# Altium PCB BCM_ECU_revA_V2.PcbDoc (part 1 of 4)
Units mm, origin at the board's own origin, x right, y up, seen from the top; angles counter-clockwise.
Board outline 170 x 110 mm, 4 copper layers (TOP SIG, GND, PWR, BOT SIG), stack 0.603 mm thick; 422 components, 413 nets, 1412 pads, 185 vias.
Unrouted connection lines stored in the file: 642.
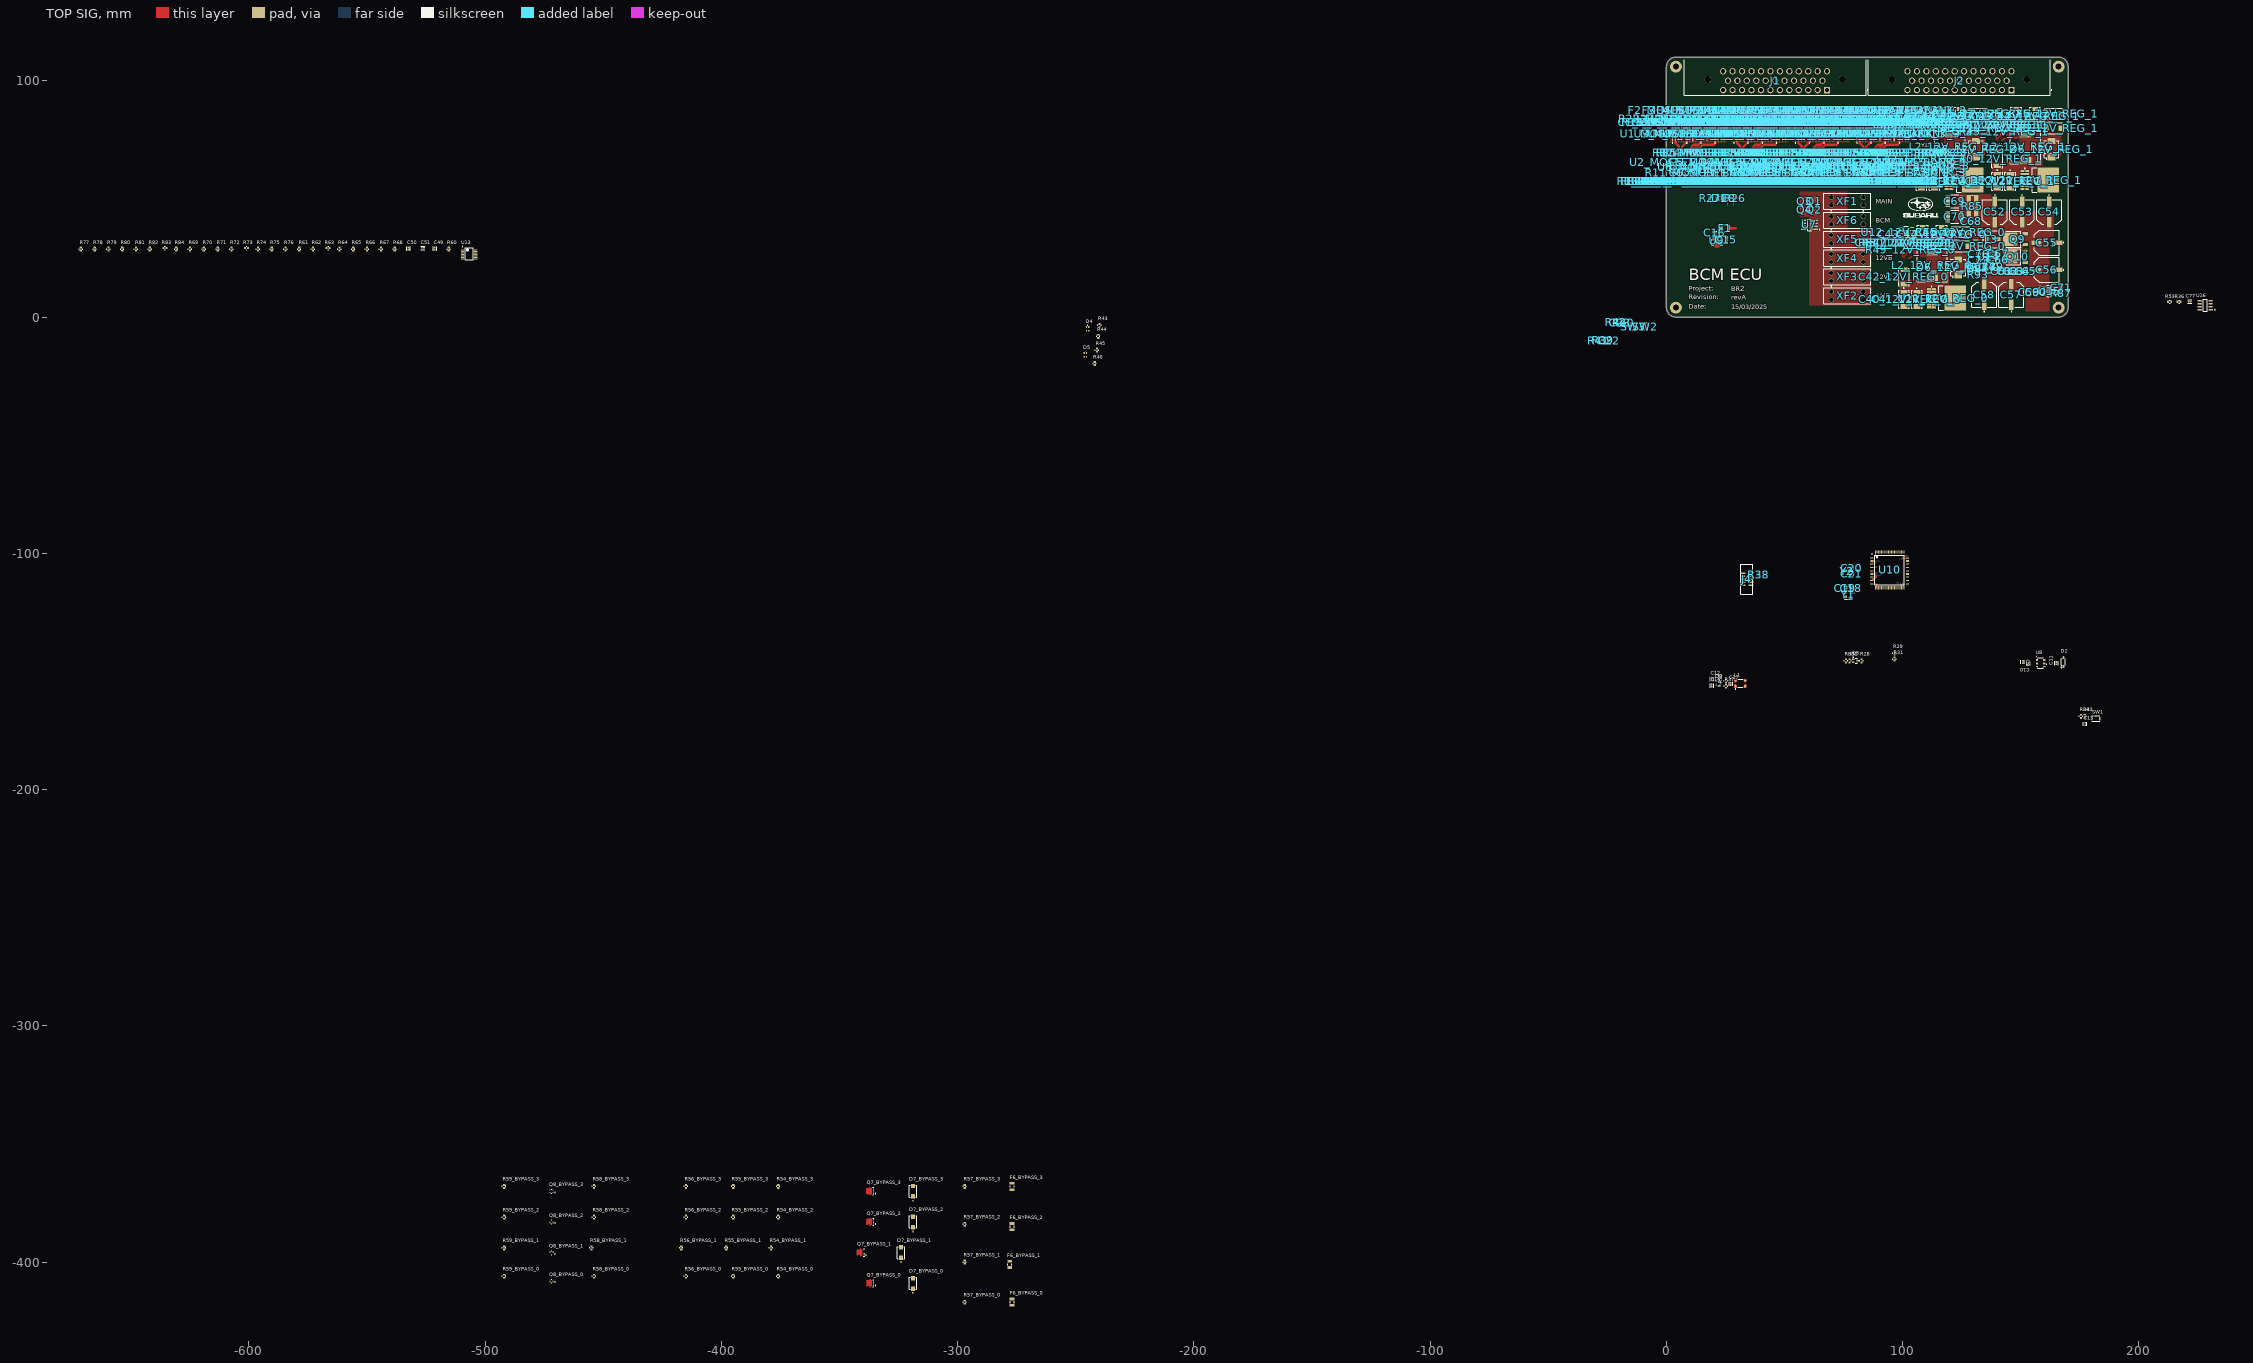
[diagram p0: TOP SIG view]
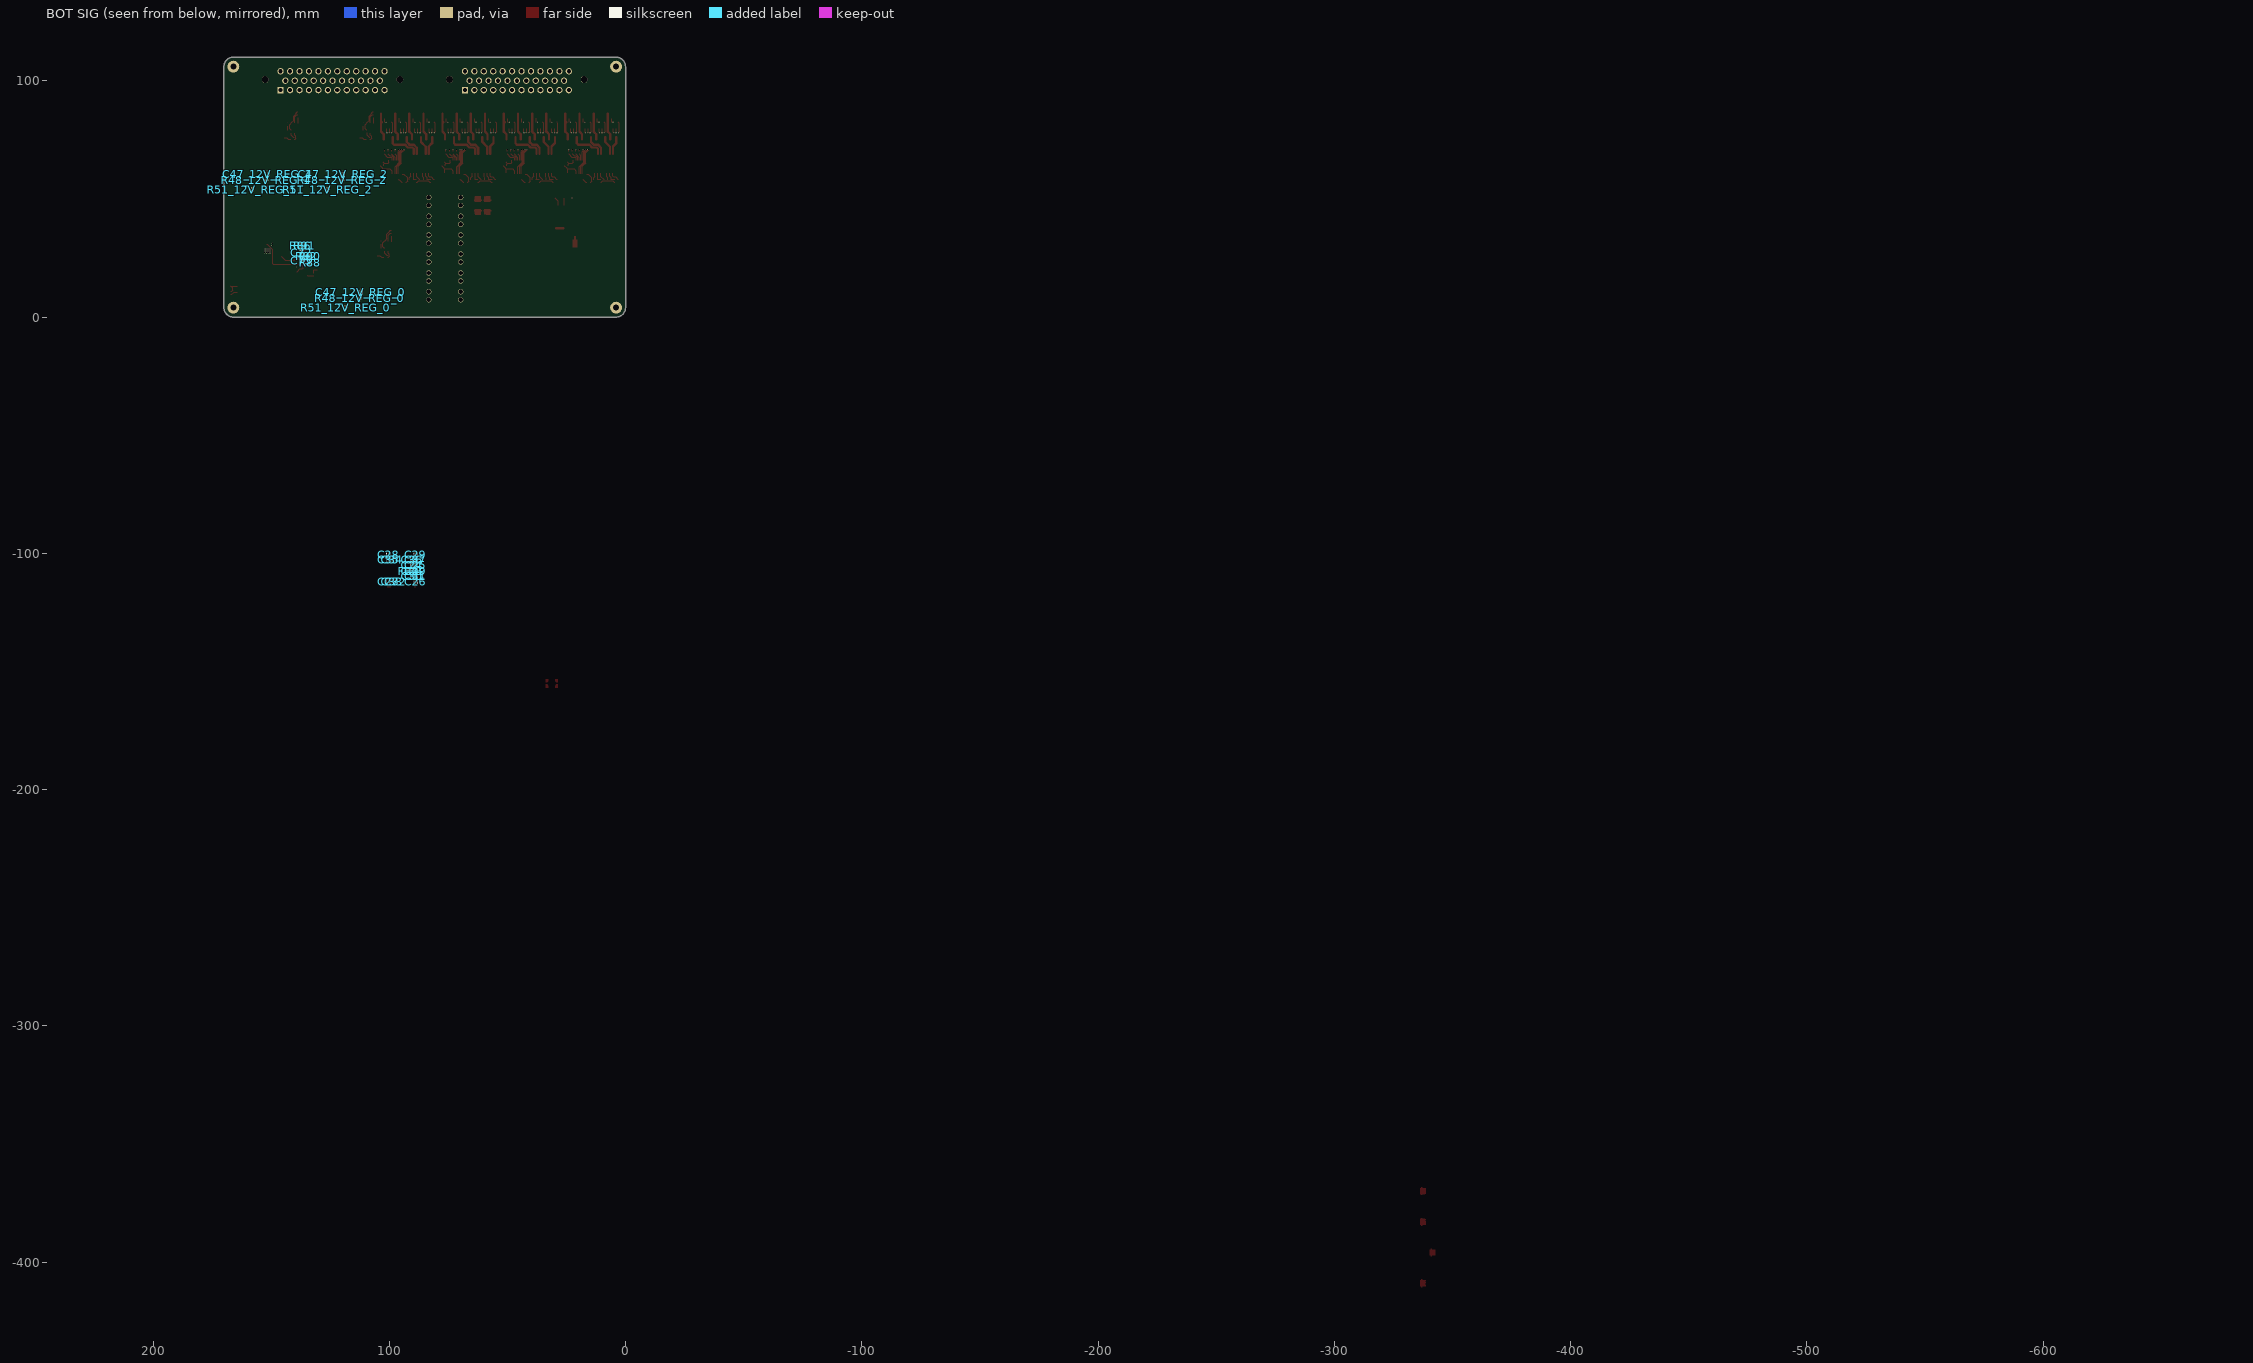
[diagram p1: BOT SIG view, seen from below]
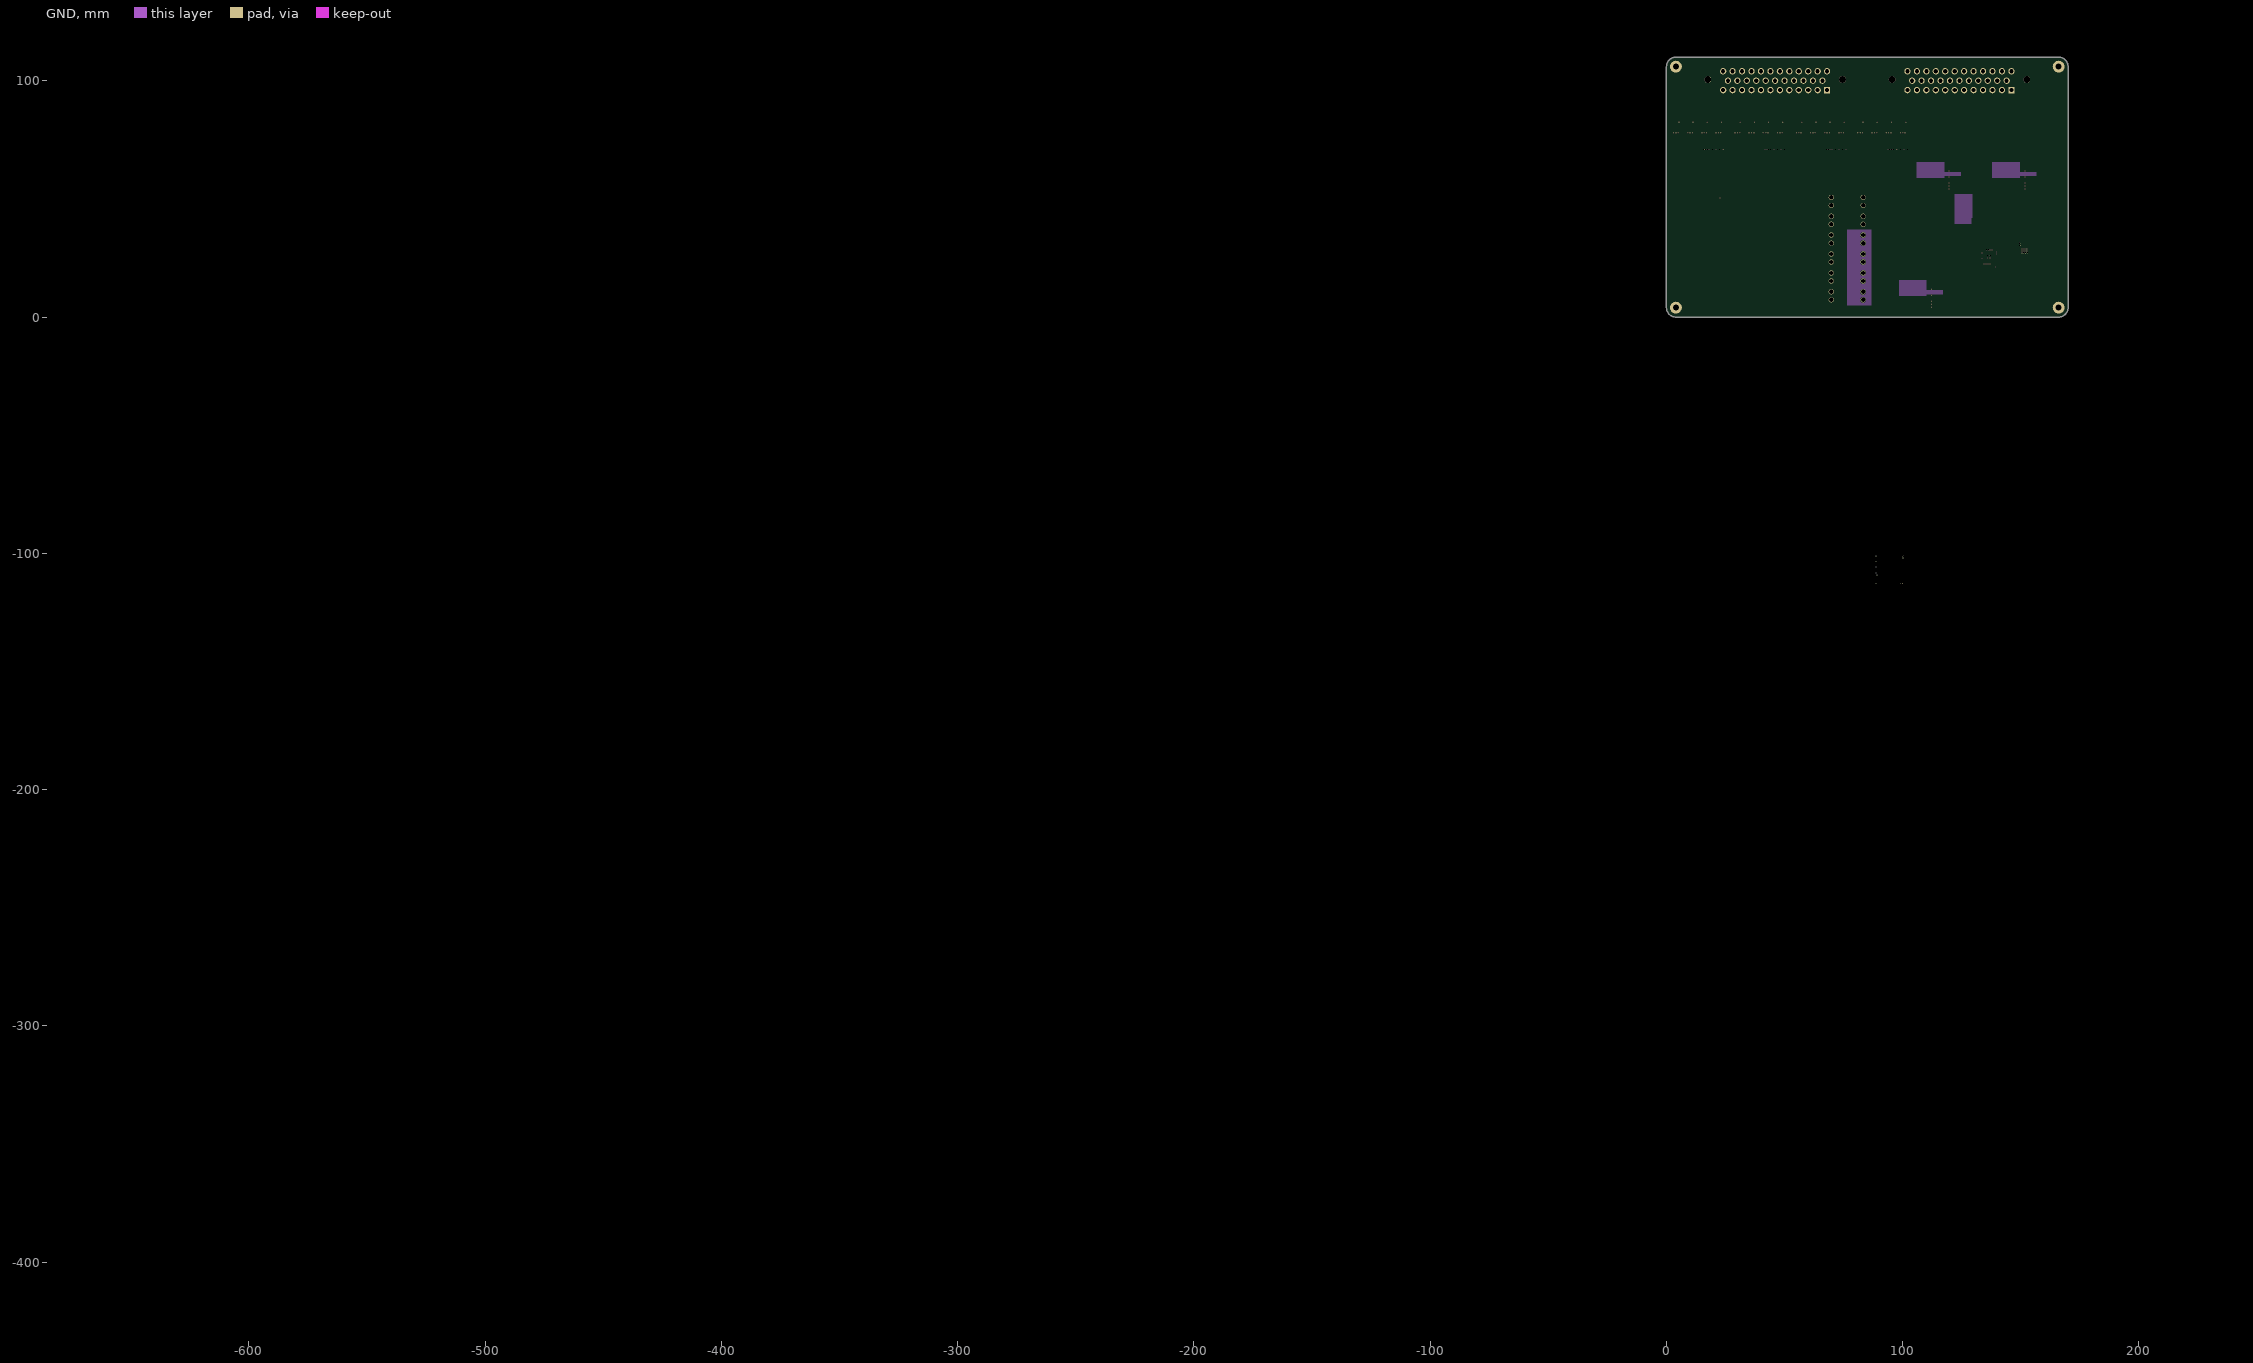
[diagram p2: GND]

## Layer stack, top to bottom
Top Solder: solder mask 0.0102, Solder Resist, Dk 3.5
TOP SIG: signal copper 0.0356
Dielectric 2: prepreg 0.0711, PP-006, Dk 4.1
GND: signal copper 0.035
Dielectric 1: dielectric 0.32, FR-4, Dk 4.8
PWR: signal copper 0.035
Dielectric 3: prepreg 0.0711, PP-006, Dk 4.1
BOT SIG: signal copper 0.0356
Bottom Solder: solder mask 0.0102, Solder Resist, Dk 3.5

## Board outline
0,4 ccw(c4,4) 4,0 166,0 ccw(c166,4) 170,4 170,106 ccw(c166,106) 166,110 4,110 ccw(c4,106) 0,106

## Design rules (kind name [scope] priority, off if disabled: settings)
BoardOutlineClearance [All] p1: gap=0.2 ignorepadtopadclearanceinfootprint=FALSE
Clearance [All] p1: gap=0.102 ignorepadtopadclearanceinfootprint=FALSE except(0.127: Arc-Via Track-Via SMDPad-Via THPad-Via Via-Via Via-Fill Via-Poly Via-Region Via-Text; 0.25: Arc-Hole Track-Hole SMDPad-Hole THPad-Hole Via-Hole Fill-Hole Poly-Hole Region-Hole Text-Hole)
ComponentClearance [All] p1: gap=0.102 collisioncheckmode=3 verticalgap=0.102 showdistances=TRUE
DiffPairsRouting [All] p1: maxlimit=0.102 minlimit=0.102 mostfreqgap=0.102 toplayer_minwidth=0.102 toplayer_maxwidth=1816.048 toplayer_prefwidth=0.102 midlayer1_minwidth=0.102 midlayer1_maxwidth=1816.048 midlayer1_prefwidth=0.102 midlayer2_minwidth=0.102 midlayer2_maxwidth=1816.048 midlayer2_prefwidth=0.102 bottomlayer_minwidth=0.102 bottomlayer_maxwidth=1816.048 bottomlayer_prefwidth=0.102 maxuncoupledlength=12.7
Height [All] p1: minheight=0 maxheight=1816.048 prefheight=12.7
HoleSize [All] p1: absolutevalues=TRUE maxlimit=6.3 minlimit=0.2 maxpercent=80.000 minpercent=20.000
HoleToHoleClearance [All] p1: gap=0.25 allowstackedmicrovias=FALSE
MinimumAnnularRing [All] p1: minimumring=0.076
MinimumSolderMaskSliver [All] p1: minsoldermaskwidth=0
PlaneClearance [All] p1: clearance=0.102
PlaneConnect PlaneConnectPowerPads [InPadClass('PowerPads')] p1: planeconnectstyle=Direct reliefexpansion=0.508 reliefentries=4 reliefconductorwidth=0.254 reliefairgap=0.254
PlaneConnect [All] p2: pad.planeconnectstyle=Relief pad.reliefexpansion=0.3 pad.reliefentries=4 pad.reliefconductorwidth=0.102 pad.reliefairgap=0.102 via.planeconnectstyle=Direct via.reliefexpansion=0.3 via.reliefentries=4 via.reliefconductorwidth=0.127 via.reliefairgap=0.127
PolygonConnect PolygonConnectPowerPads [All vs (InPadClass('PowerPads'))] p1: connectstyle=Direct reliefconductorwidth=0.254 reliefentries=4 polygonreliefangle="90 Angle" airgapwidth=0.254
PolygonConnect [All] p2: thpad.connectstyle=Relief thpad.reliefconductorwidth=0.102 thpad.reliefentries=4 thpad.polygonreliefangle="90 Angle" thpad.airgapwidth=0.102 smdpad.connectstyle=Relief smdpad.reliefconductorwidth=0.102 smdpad.reliefentries=4 smdpad.polygonreliefangle="90 Angle" smdpad.airgapwidth=0.102 via.connectstyle=Direct via.reliefconductorwidth=0.127 via.reliefentries=4 via.polygonreliefangle="90 Angle" via.airgapwidth=0.127
RoomDefinition 12V_REG_0 [InComponentClass('12V_REG_0')] p1: confinementstyle=ConfineIn formatcopy=TRUE lockcomponents=FALSE outline 129.5,40 97.5,40 97.5,2 129.5,2
RoomDefinition AMP_REG_0 [InComponentClass('AMP_REG_0')] p2: confinementstyle=ConfineIn formatcopy=TRUE lockcomponents=FALSE outline 117,2 169,2 169,52.5 117,52.5
RoomDefinition 12V_REG_1 [InComponentClass('12V_REG_1')] p3: confinementstyle=ConfineIn formatcopy=TRUE lockcomponents=FALSE outline 169,90 137,90 137,52 169,52
RoomDefinition 12V_REG_2 [InComponentClass('12V_REG_2')] p4: confinementstyle=ConfineIn formatcopy=TRUE lockcomponents=FALSE outline 137,90 105,90 105,52 137,52
RoomDefinition MOSFET_BANK_3 [InComponentClass('MOSFET_BANK_3')] p5: confinementstyle=ConfineIn formatcopy=TRUE lockcomponents=FALSE outline 79,56 105,56 105,90 79,90
RoomDefinition MOSFET_BANK_2 [InComponentClass('MOSFET_BANK_2')] p6: confinementstyle=ConfineIn formatcopy=TRUE lockcomponents=FALSE outline 53,56 79,56 79,90 53,90
RoomDefinition MOSFET_BANK_1 [InComponentClass('MOSFET_BANK_1')] p7: confinementstyle=ConfineIn formatcopy=TRUE lockcomponents=FALSE outline 27,56 53,56 53,90 27,90
RoomDefinition MOSFET_BANK_0 [InComponentClass('MOSFET_BANK_0')] p8: confinementstyle=ConfineIn formatcopy=TRUE lockcomponents=FALSE outline 1,56 27,56 27,90 1,90
RoomDefinition BYPASS_3 [InComponentClass('BYPASS_3')] p9: confinementstyle=ConfineIn formatcopy=TRUE lockcomponents=FALSE outline -585,-417 -557,-417 -557,-402 -585,-402
RoomDefinition BYPASS_2 [InComponentClass('BYPASS_2')] p10: confinementstyle=ConfineIn formatcopy=TRUE lockcomponents=FALSE outline -672,-394 -652,-394 -652,-374 -672,-374
RoomDefinition BYPASS_1 [InComponentClass('BYPASS_1')] p11: confinementstyle=ConfineIn formatcopy=TRUE lockcomponents=FALSE outline -660,-411 -627,-411 -627,-400 -660,-400
RoomDefinition BYPASS_0 [InComponentClass('BYPASS_0')] p12: confinementstyle=ConfineIn formatcopy=TRUE lockcomponents=FALSE outline -609,-426 -595,-426 -595,-417 -609,-417
RoutingVias [All] p1: holewidth=0.2 width=0.45 viastyle="Through Hole" minholewidth=0.2 minwidth=0.45 maxholewidth=6.3 maxwidth=6.55
SilkToSilkClearance [All] p1: silktosilkclearance=0
SilkToSolderMaskClearance [IsPad] p1: minsilkscreentomaskgap=0.102 clearancetoexposedcopper=TRUE
SolderMaskExpansion [All] p1: expansion=0.075 istentingtop=FALSE
Width [All] p1: maxlimit=1816.048 minlimit=0.102 preferedwidth=0.102
20 further rules are at their usual default settings.

## Classes and differential pairs
component class MEM_0: C77 R36 R53 U16
component class AMP_REG_0: C52 C53 C54 C55 C56 C57 C58 C59 C60 C61 C62 C63 C64 C65 C66 C67 C68 C69 C70 C71 C72 C73 C74 C75 C76 D8 L3 Q9 Q10 R85 R86 R87 R88 R89 R90 R91 R92 R93 R94 U14 U15
component class 12V_REG_2: C40_12V_REG_2 C41_12V_REG_2 C42_12V_REG_2 C43_12V_REG_2 C44_12V_REG_2 C45_12V_REG_2 C46_12V_REG_2 C47_12V_REG_2 C48_12V_REG_2 D6_12V_REG_2 L2_12V_REG_2 R47_12V_REG_2 R48_12V_REG_2 R49_12V_REG_2 R50_12V_REG_2 R51_12V_REG_2 R52_12V_REG_2 U11_12V_REG_2 U12_12V_REG_2
channel class MOSFET_BANK: MOSFET_BANK_0 MOSFET_BANK_1 MOSFET_BANK_2 MOSFET_BANK_3
channel class BYPASS_BLOCK: BYPASS_0 BYPASS_1 BYPASS_2 BYPASS_3
channel class 12V_REG: 12V_REG_0 12V_REG_1 12V_REG_2
net class 120DIFF: CAN_N CAN_P PRE_CAN_N PRE_CAN_P TERM_CAP
component class PWR_MGMT: C8 C9 C10 C11 C12 C13 C14 C15 C16 C17 D1 D2 D3 L1 Q1 Q2 Q3 Q4 Q5 Q6 Q7 R26 R27 R28 R29 R30 R31 R32 R33 R34 R35 R37 SW1 U7 U8 U9
component class MOSFET_BANK_3: C1_MOSFET_BANK_3 C2_MOSFET_BANK_3 C3_MOSFET_BANK_3 C4_MOSFET_BANK_3 C5_MOSFET_BANK_3 C6_MOSFET_BANK_3 C7_MOSFET_BANK_3 F2_MOSFET_BANK_3 F3_MOSFET_BANK_3 F4_MOSFET_BANK_3 F5_MOSFET_BANK_3 R1_MOSFET_BANK_3 R2_MOSFET_BANK_3 R3_MOSFET_BANK_3 R4_MOSFET_BANK_3 R5_MOSFET_BANK_3 R6_MOSFET_BANK_3 R7_MOSFET_BANK_3 R8_MOSFET_BANK_3 R9_MOSFET_BANK_3 R10_MOSFET_BANK_3 R11_MOSFET_BANK_3 R12_MOSFET_BANK_3 R13_MOSFET_BANK_3 R14_MOSFET_BANK_3 R15_MOSFET_BANK_3 R16_MOSFET_BANK_3 R17_MOSFET_BANK_3 R18_MOSFET_BANK_3 R19_MOSFET_BANK_3 R20_MOSFET_BANK_3 R21_MOSFET_BANK_3 R22_MOSFET_BANK_3 R23_MOSFET_BANK_3 R24_MOSFET_BANK_3 R25_MOSFET_BANK_3 U1_MOSFET_BANK_3 U2_MOSFET_BANK_3 U3_MOSFET_BANK_3 U4_MOSFET_BANK_3 U5_MOSFET_BANK_3 U6_MOSFET_BANK_3
component class MOSFET_BANK_2: C1_MOSFET_BANK_2 C2_MOSFET_BANK_2 C3_MOSFET_BANK_2 C4_MOSFET_BANK_2 C5_MOSFET_BANK_2 C6_MOSFET_BANK_2 C7_MOSFET_BANK_2 F2_MOSFET_BANK_2 F3_MOSFET_BANK_2 F4_MOSFET_BANK_2 F5_MOSFET_BANK_2 R1_MOSFET_BANK_2 R2_MOSFET_BANK_2 R3_MOSFET_BANK_2 R4_MOSFET_BANK_2 R5_MOSFET_BANK_2 R6_MOSFET_BANK_2 R7_MOSFET_BANK_2 R8_MOSFET_BANK_2 R9_MOSFET_BANK_2 R10_MOSFET_BANK_2 R11_MOSFET_BANK_2 R12_MOSFET_BANK_2 R13_MOSFET_BANK_2 R14_MOSFET_BANK_2 R15_MOSFET_BANK_2 R16_MOSFET_BANK_2 R17_MOSFET_BANK_2 R18_MOSFET_BANK_2 R19_MOSFET_BANK_2 R20_MOSFET_BANK_2 R21_MOSFET_BANK_2 R22_MOSFET_BANK_2 R23_MOSFET_BANK_2 R24_MOSFET_BANK_2 R25_MOSFET_BANK_2 U1_MOSFET_BANK_2 U2_MOSFET_BANK_2 U3_MOSFET_BANK_2 U4_MOSFET_BANK_2 U5_MOSFET_BANK_2 U6_MOSFET_BANK_2
component class MOSFET_BANK_1: C1_MOSFET_BANK_1 C2_MOSFET_BANK_1 C3_MOSFET_BANK_1 C4_MOSFET_BANK_1 C5_MOSFET_BANK_1 C6_MOSFET_BANK_1 C7_MOSFET_BANK_1 F2_MOSFET_BANK_1 F3_MOSFET_BANK_1 F4_MOSFET_BANK_1 F5_MOSFET_BANK_1 R1_MOSFET_BANK_1 R2_MOSFET_BANK_1 R3_MOSFET_BANK_1 R4_MOSFET_BANK_1 R5_MOSFET_BANK_1 R6_MOSFET_BANK_1 R7_MOSFET_BANK_1 R8_MOSFET_BANK_1 R9_MOSFET_BANK_1 R10_MOSFET_BANK_1 R11_MOSFET_BANK_1 R12_MOSFET_BANK_1 R13_MOSFET_BANK_1 R14_MOSFET_BANK_1 R15_MOSFET_BANK_1 R16_MOSFET_BANK_1 R17_MOSFET_BANK_1 R18_MOSFET_BANK_1 R19_MOSFET_BANK_1 R20_MOSFET_BANK_1 R21_MOSFET_BANK_1 R22_MOSFET_BANK_1 R23_MOSFET_BANK_1 R24_MOSFET_BANK_1 R25_MOSFET_BANK_1 U1_MOSFET_BANK_1 U2_MOSFET_BANK_1 U3_MOSFET_BANK_1 U4_MOSFET_BANK_1 U5_MOSFET_BANK_1 U6_MOSFET_BANK_1
component class MOSFET_BANK_0: C1_MOSFET_BANK_0 C2_MOSFET_BANK_0 C3_MOSFET_BANK_0 C4_MOSFET_BANK_0 C5_MOSFET_BANK_0 C6_MOSFET_BANK_0 C7_MOSFET_BANK_0 F2_MOSFET_BANK_0 F3_MOSFET_BANK_0 F4_MOSFET_BANK_0 F5_MOSFET_BANK_0 R1_MOSFET_BANK_0 R2_MOSFET_BANK_0 R3_MOSFET_BANK_0 R4_MOSFET_BANK_0 R5_MOSFET_BANK_0 R6_MOSFET_BANK_0 R7_MOSFET_BANK_0 R8_MOSFET_BANK_0 R9_MOSFET_BANK_0 R10_MOSFET_BANK_0 R11_MOSFET_BANK_0 R12_MOSFET_BANK_0 R13_MOSFET_BANK_0 R14_MOSFET_BANK_0 R15_MOSFET_BANK_0 R16_MOSFET_BANK_0 R17_MOSFET_BANK_0 R18_MOSFET_BANK_0 R19_MOSFET_BANK_0 R20_MOSFET_BANK_0 R21_MOSFET_BANK_0 R22_MOSFET_BANK_0 R23_MOSFET_BANK_0 R24_MOSFET_BANK_0 R25_MOSFET_BANK_0 U1_MOSFET_BANK_0 U2_MOSFET_BANK_0 U3_MOSFET_BANK_0 U4_MOSFET_BANK_0 U5_MOSFET_BANK_0 U6_MOSFET_BANK_0
component class MCU_0: C18 C19 C20 C21 C22 C23 C24 C25 C26 C27 C28 C29 C30 C31 C32 C33 C34 C35 C36 C37 C38 C39 D4 D5 FB1 J4 R38 R39 R40 R41 R42 R43 R44 R45 R46 SW2 SW3 U10 Y1 Y2
component class BCM_ECU: F1 J1 J2 XF1 XF2 XF3 XF4 XF5 XF6
component class BYPASS_3: D7_BYPASS_3 F6_BYPASS_3 Q7_BYPASS_3 Q8_BYPASS_3 R54_BYPASS_3 R55_BYPASS_3 R56_BYPASS_3 R57_BYPASS_3 R58_BYPASS_3 R59_BYPASS_3
component class BYPASS_2: D7_BYPASS_2 F6_BYPASS_2 Q7_BYPASS_2 Q8_BYPASS_2 R54_BYPASS_2 R55_BYPASS_2 R56_BYPASS_2 R57_BYPASS_2 R58_BYPASS_2 R59_BYPASS_2
component class BYPASS_1: D7_BYPASS_1 F6_BYPASS_1 Q7_BYPASS_1 Q8_BYPASS_1 R54_BYPASS_1 R55_BYPASS_1 R56_BYPASS_1 R57_BYPASS_1 R58_BYPASS_1 R59_BYPASS_1
component class BYPASS_0: D7_BYPASS_0 F6_BYPASS_0 Q7_BYPASS_0 Q8_BYPASS_0 R54_BYPASS_0 R55_BYPASS_0 R56_BYPASS_0 R57_BYPASS_0 R58_BYPASS_0 R59_BYPASS_0
component class ADC_0: C49 C50 C51 R60 R61 R62 R63 R64 R65 R66 R67 R68 R69 R70 R71 R72 R73 R74 R75 R76 R77 R78 R79 R80 R81 R82 R83 R84 U13
component class 12V_REG_1: C40_12V_REG_1 C41_12V_REG_1 C42_12V_REG_1 C43_12V_REG_1 C44_12V_REG_1 C45_12V_REG_1 C46_12V_REG_1 C47_12V_REG_1 C48_12V_REG_1 D6_12V_REG_1 G L2_12V_REG_1 R47_12V_REG_1 R48_12V_REG_1 R49_12V_REG_1 R50_12V_REG_1 R51_12V_REG_1 R52_12V_REG_1 U11_12V_REG_1 U12_12V_REG_1
component class 12V_REG_0: C40_12V_REG_0 C41_12V_REG_0 C42_12V_REG_0 C43_12V_REG_0 C44_12V_REG_0 C45_12V_REG_0 C46_12V_REG_0 C47_12V_REG_0 C48_12V_REG_0 D6_12V_REG_0 L2_12V_REG_0 R47_12V_REG_0 R48_12V_REG_0 R49_12V_REG_0 R50_12V_REG_0 R51_12V_REG_0 R52_12V_REG_0 U11_12V_REG_0 U12_12V_REG_0
differential pair X: +X_P -X_N
differential pair X32: +X32_P -X32_N
differential pair PRE_CAN: +PRE_CAN_P -PRE_CAN_N

## Components (designator, comment, footprint, x,y, rotation, side; value= is the part's Value field where it differs from the comment)
C1_MOSFET_BANK_0 "100n" FP-0402-L_1_0_0_05-W_0_5-IPC_A 3.5,82.5 r0 top (schematic designator C1)
C1_MOSFET_BANK_1 "100n" FP-0402-L_1_0_0_05-W_0_5-IPC_A 29.5,82.5 r0 top (schematic designator C1)
C1_MOSFET_BANK_2 "100n" FP-0402-L_1_0_0_05-W_0_5-IPC_A 55.5,82.5 r0 top (schematic designator C1)
C1_MOSFET_BANK_3 "100n" FP-0402-L_1_0_0_05-W_0_5-IPC_A 81.5,82.5 r0 top (schematic designator C1)
C2_MOSFET_BANK_0 "100n" FP-0402-L_1_0_0_05-W_0_5-IPC_A 9.5,82.5 r0 top (schematic designator C2)
C2_MOSFET_BANK_1 "100n" FP-0402-L_1_0_0_05-W_0_5-IPC_A 35.5,82.5 r0 top (schematic designator C2)
C2_MOSFET_BANK_2 "100n" FP-0402-L_1_0_0_05-W_0_5-IPC_A 61.5,82.5 r0 top (schematic designator C2)
C2_MOSFET_BANK_3 "100n" FP-0402-L_1_0_0_05-W_0_5-IPC_A 87.5,82.5 r0 top (schematic designator C2)
C3_MOSFET_BANK_0 "100n" FP-0402-L_1_0_0_05-W_0_5-IPC_A 15.5,82.5 r0 top (schematic designator C3)
C3_MOSFET_BANK_1 "100n" FP-0402-L_1_0_0_05-W_0_5-IPC_A 41.5,82.5 r0 top (schematic designator C3)
C3_MOSFET_BANK_2 "100n" FP-0402-L_1_0_0_05-W_0_5-IPC_A 67.5,82.5 r0 top (schematic designator C3)
C3_MOSFET_BANK_3 "100n" FP-0402-L_1_0_0_05-W_0_5-IPC_A 93.5,82.5 r0 top (schematic designator C3)
C4_MOSFET_BANK_0 "100n" FP-0402-L_1_0_0_05-W_0_5-IPC_A 21.5,82.5 r0 top (schematic designator C4)
C4_MOSFET_BANK_1 "100n" FP-0402-L_1_0_0_05-W_0_5-IPC_A 47.5,82.5 r0 top (schematic designator C4)
C4_MOSFET_BANK_2 "100n" FP-0402-L_1_0_0_05-W_0_5-IPC_A 73.5,82.5 r0 top (schematic designator C4)
C4_MOSFET_BANK_3 "100n" FP-0402-L_1_0_0_05-W_0_5-IPC_A 99.5,82.5 r0 top (schematic designator C4)
C5_MOSFET_BANK_0 "100n" FP-0402-L_1_0_0_05-W_0_5-IPC_A 25,65.5 r0 top (schematic designator C5)
C5_MOSFET_BANK_1 "100n" FP-0402-L_1_0_0_05-W_0_5-IPC_A 51,65.5 r0 top (schematic designator C5)
C5_MOSFET_BANK_2 "100n" FP-0402-L_1_0_0_05-W_0_5-IPC_A 77,65.5 r0 top (schematic designator C5)
C5_MOSFET_BANK_3 "100n" FP-0402-L_1_0_0_05-W_0_5-IPC_A 103,65.5 r0 top (schematic designator C5)
C6_MOSFET_BANK_0 "100n" FP-0402-L_1_0_0_05-W_0_5-IPC_A 25,61 r0 top (schematic designator C6)
C6_MOSFET_BANK_1 "100n" FP-0402-L_1_0_0_05-W_0_5-IPC_A 51,61 r0 top (schematic designator C6)
C6_MOSFET_BANK_2 "100n" FP-0402-L_1_0_0_05-W_0_5-IPC_A 77,61 r0 top (schematic designator C6)
C6_MOSFET_BANK_3 "100n" FP-0402-L_1_0_0_05-W_0_5-IPC_A 103,61 r0 top (schematic designator C6)
C7_MOSFET_BANK_0 "100n" FP-0402-L_1_0_0_05-W_0_5-IPC_A 25,62.5 r0 top (schematic designator C7)
C7_MOSFET_BANK_1 "100n" FP-0402-L_1_0_0_05-W_0_5-IPC_A 51,62.5 r0 top (schematic designator C7)
C7_MOSFET_BANK_2 "100n" FP-0402-L_1_0_0_05-W_0_5-IPC_A 77,62.5 r0 top (schematic designator C7)
C7_MOSFET_BANK_3 "100n" FP-0402-L_1_0_0_05-W_0_5-IPC_A 103,62.5 r0 top (schematic designator C7)
C8 "100n" FP-0402-L_1_0_0_05-W_0_5-IPC_A 26.37,50.396 r0 top
C9 "100n" FP-0402-L_1_0_0_05-W_0_5-IPC_A 150.75,-146 r270 top
C10 "100n" FP-0402-L_1_0_0_05-W_0_5-IPC_A 153.25,-146.75 r270 top
C11 "100n" FP-0402-L_1_0_0_05-W_0_5-IPC_A 165,-146.479 r90 top
C12 "6.6p" FP-0402-L_1_0_0_05-W_0_5-IPC_A 19.25,-153.229 r90 top
C13 "100n" FP-0402-L_1_0_0_05-W_0_5-IPC_A 177.25,-172.25 r90 top
C14 "6.6p" FP-0402-L_1_0_0_05-W_0_5-IPC_A 19.25,-156 r90 top
C15 "C0805C225K9PACTU" CAPC2013X145X50ML20T25 25.37,32.646 r90 top
C16 "100n" FP-0402-L_1_0_0_05-W_0_5-IPC_A 20.37,35.646 r0 top
C17 "100n" FP-0402-L_1_0_0_05-W_0_5-IPC_A 27.25,-155.229 r90 top
C18 "6.8p" FP-0402-L_1_0_0_05-W_0_5-IPC_A 78.25,-114.75 r0 top
C19 "6.8p" FP-0402-L_1_0_0_05-W_0_5-IPC_A 75.75,-114.75 r180 top
C20 "18p" FP-0402-L_1_0_0_05-W_0_5-IPC_A 78.5,-106.25 r90 top
C21 "18p" FP-0402-L_1_0_0_05-W_0_5-IPC_A 78.5,-108.75 r270 top
C22 "100n" FP-0402-L_1_0_0_05-W_0_5-IPC_A -24.164,-10.021 r90 top
C23 "100n" FP-0402-L_1_0_0_05-W_0_5-IPC_A -19.664,-2.5 r90 top
C24 "100n" FP-0402-L_1_0_0_05-W_0_5-IPC_A 90.25,-105 r90 bottom
C25 "100n" FP-0402-L_1_0_0_05-W_0_5-IPC_A 88.75,-105 r90 bottom
C26 "100n" FP-0402-L_1_0_0_05-W_0_5-IPC_A 88.75,-112 r90 bottom
C27 "100n" FP-0402-L_1_0_0_05-W_0_5-IPC_A 100.25,-112 r90 bottom
C28 "100n" FP-0402-L_1_0_0_05-W_0_5-IPC_A 100.25,-100.5 r90 bottom
C29 "100n" FP-0402-L_1_0_0_05-W_0_5-IPC_A 88.75,-100.5 r90 bottom
C30 "1u" FP-0402-L_1_0_0_05-W_0_5-IPC_A 90.25,-109.75 r270 bottom
C31 "100n" FP-0402-L_1_0_0_05-W_0_5-IPC_A 88.75,-109.75 r270 bottom
C32 "2.2u" FP-0402-L_1_0_0_05-W_0_5-IPC_A 97.25,-112 r90 bottom
C33 "100n" FP-0402-L_1_0_0_05-W_0_5-IPC_A 98.75,-112 r90 bottom
C34 "2.2u" FP-0402-L_1_0_0_05-W_0_5-IPC_A 98.75,-102.75 r270 bottom
C35 "100n" FP-0402-L_1_0_0_05-W_0_5-IPC_A 100.25,-102.75 r270 bottom
C36 "1u" FP-0402-L_1_0_0_05-W_0_5-IPC_A 90.25,-102.75 r90 bottom
C37 "100n" FP-0402-L_1_0_0_05-W_0_5-IPC_A 88.75,-102.75 r90 bottom
C38 "1u" FP-0402-L_1_0_0_05-W_0_5-IPC_A 90.25,-107.5 r90 bottom
C39 "100n" FP-0402-L_1_0_0_05-W_0_5-IPC_A 88.75,-107.5 r90 bottom
C40_12V_REG_0 "TPSE686K025R0125" FP-TPSE-MFG 100.5,7.5 r90 top (schematic designator C40)
C40_12V_REG_1 "TPSE686K025R0125" FP-TPSE-MFG 140,67.01 r270 top (schematic designator C40)
C40_12V_REG_2 "TPSE686K025R0125" FP-TPSE-MFG 113.5,57.5 r90 top (schematic designator C40)
C41_12V_REG_0 "TPSE686K025R0125" FP-TPSE-MFG 106,7.5 r90 top (schematic designator C41)
C41_12V_REG_1 "TPSE686K025R0125" FP-TPSE-MFG 140,57.5 r90 top (schematic designator C41)
C41_12V_REG_2 "TPSE686K025R0125" FP-TPSE-MFG 108,57.5 r90 top (schematic designator C41)
C42_12V_REG_0 "TPSE686K025R0125" FP-TPSE-MFG 100.5,17 r270 top (schematic designator C42)
C42_12V_REG_1 "TPSE686K025R0125" FP-TPSE-MFG 145.5,57.5 r90 top (schematic designator C42)
C42_12V_REG_2 "TPSE686K025R0125" FP-TPSE-MFG 108,67 r270 top (schematic designator C42)
C43_12V_REG_0 "T495D107K016ATE125" FP-T495D107K016ATE125-MFG 108.5,35 r270 top (schematic designator C43)
C43_12V_REG_1 "T495D107K016ATE125" FP-T495D107K016ATE125-MFG 148,85 r270 top (schematic designator C43)
C43_12V_REG_2 "T495D107K016ATE125" FP-T495D107K016ATE125-MFG 116,85 r270 top (schematic designator C43)
C44_12V_REG_0 "T495D107K016ATE125" FP-T495D107K016ATE125-MFG 116.5,35 r270 top (schematic designator C44)
C44_12V_REG_1 "T495D107K016ATE125" FP-T495D107K016ATE125-MFG 156,85 r270 top (schematic designator C44)
C44_12V_REG_2 "T495D107K016ATE125" FP-T495D107K016ATE125-MFG 124,85 r270 top (schematic designator C44)
C45_12V_REG_0 "T495D107K016ATE125" FP-T495D107K016ATE125-MFG 124.5,36 r180 top (schematic designator C45)
C45_12V_REG_1 "T495D107K016ATE125" FP-T495D107K016ATE125-MFG 164,86 r180 top (schematic designator C45)
C45_12V_REG_2 "T495D107K016ATE125" FP-T495D107K016ATE125-MFG 132,86 r180 top (schematic designator C45)
C46_12V_REG_0 "T495D107K016ATE125" FP-T495D107K016ATE125-MFG 124.5,30 r180 top (schematic designator C46)
C46_12V_REG_1 "T495D107K016ATE125" FP-T495D107K016ATE125-MFG 164,80 r180 top (schematic designator C46)
C46_12V_REG_2 "T495D107K016ATE125" FP-T495D107K016ATE125-MFG 132,80 r180 top (schematic designator C46)
C47_12V_REG_0 "100n" FP-0402-L_1_0_0_05-W_0_5-IPC_A 112,10.5 r270 bottom (schematic designator C47)
C47_12V_REG_1 "100n" FP-0402-L_1_0_0_05-W_0_5-IPC_A 151.5,60.5 r270 bottom (schematic designator C47)
C47_12V_REG_2 "100n" FP-0402-L_1_0_0_05-W_0_5-IPC_A 119.5,60.5 r270 bottom (schematic designator C47)
C48_12V_REG_0 "100n" FP-0402-L_1_0_0_05-W_0_5-IPC_A 99,31.5 r270 top (schematic designator C48)
C48_12V_REG_1 "100n" FP-0402-L_1_0_0_05-W_0_5-IPC_A 138.5,81.5 r270 top (schematic designator C48)
C48_12V_REG_2 "100n" FP-0402-L_1_0_0_05-W_0_5-IPC_A 106.5,81.5 r270 top (schematic designator C48)
C49 "100n" FP-0402-L_1_0_0_05-W_0_5-IPC_A -521.304,29.004 r90 top
C50 "100n" FP-0402-L_1_0_0_05-W_0_5-IPC_A -532.48,29.004 r90 top
C51 "100n" FP-0402-L_1_0_0_05-W_0_5-IPC_A -526.384,29.258 r0 top
C52 "50SVPF68M" FP-OS-CON-SMT-F12-MFG 139,44.5 r270 top
C53 "50SVPF68M" FP-OS-CON-SMT-F12-MFG 150.5,44.5 r270 top
C54 "50SVPF68M" FP-OS-CON-SMT-F12-MFG 162,44.5 r270 top
C55 "50SVPF68M" FP-OS-CON-SMT-F12-MFG 161,31.5 r180 top
C56 "50SVPF68M" FP-OS-CON-SMT-F12-MFG 161,20 r180 top
C57 "50SVPF68M" FP-OS-CON-SMT-F12-MFG 146,9.5 r90 top
C58 "50SVPF68M" FP-OS-CON-SMT-F12-MFG 134.5,9.5 r90 top
C59 "GRM31CR61H106KA12L" FP-GRM31-0_2-MFG 153.5,10.5 r270 top value=10uF
C60 "GRM31CR61H106KA12L" FP-GRM31-0_2-MFG 156.5,10.5 r270 top value=10uF
C61 "GRM31CR61H106KA12L" FP-GRM31-0_2-MFG 142,19.5 r90 top value=10uF
C62 "GRM31CR61H106KA12L" FP-GRM31-0_2-MFG 144.5,19.5 r90 top value=10uF
C63 "GRM31CR61H106KA12L" FP-GRM31-0_2-MFG 147,19.5 r90 top value=10uF
C64 "GRM31CR61H106KA12L" FP-GRM31-0_2-MFG 149.5,19.5 r90 top value=10uF
C65 "GRM31CR61H106KA12L" FP-GRM31-0_2-MFG 152,19.5 r90 top value=10uF
C66 "100n" FP-0402-L_1_0_0_05-W_0_5-IPC_A 140.5,24.25 r90 top
C67 "1u" FP-0402-L_1_0_0_05-W_0_5-IPC_A 140.5,26.75 r90 top
C68 "C1206C105K5RACTU" CAPC3216X110X50LL20T25 129,40.5 r180 top
C69 "CKG57NX5R1H226M500JH" FP-CKG57N-MFG 122,49 r180 top
C70 "CKG57NX5R1H226M500JH" FP-CKG57N-MFG 122,42.5 r180 top
C71 "100n" FP-0402-L_1_0_0_05-W_0_5-IPC_A 167,12.5 r270 top
C72 "4.7u" FP-0402-L_1_0_0_05-W_0_5-IPC_A 137,27.25 r180 bottom
C73 "470n" FP-0402-L_1_0_0_05-W_0_5-IPC_A 132.25,24 r270 top
C74 "47p" FP-0402-L_1_0_0_05-W_0_5-IPC_A 135,21.25 r0 top
C75 "6.8n" FP-0402-L_1_0_0_05-W_0_5-IPC_A 137,23.75 r0 bottom
C76 "470p" FP-0402-L_1_0_0_05-W_0_5-IPC_A 132.25,26.5 r270 top
C77 "100n" FP-0402-L_1_0_0_05-W_0_5-IPC_A 221.498,6.499 r180 top
D1 "MMSZ5242BT1G" ONSC-SOD-123-2-425-04_V 22.62,50.396 r180 top
D2 "1N4148W-TP" FP-SOD-123-IPC_A 168,-146 r90 top
D3 "ESDCAN02-2BWY" FP-SOT323-3L-MFG 22,-155 r0 top value=3pF
D4 "150066RG54050" WL-SBCD_0606 -245,-5 r0 top
D5 "150066RG54050" WL-SBCD_0606 -246,-16 r0 top
D6_12V_REG_0 "B540C-13-F" FP-SMC-MFG 123.5,21 r90 top value=300pF (schematic designator D6)
D6_12V_REG_1 "B540C-13-F" FP-SMC-MFG 163,71 r90 top value=300pF (schematic designator D6)
D6_12V_REG_2 "B540C-13-F" FP-SMC-MFG 131,71 r90 top value=300pF (schematic designator D6)
D7_BYPASS_0 "SK34A-LTP" SK34A-LTP-Footprint-1 -319,-409 r90 top (schematic designator D7)
D7_BYPASS_1 "SK34A-LTP" SK34A-LTP-Footprint-1 -324,-396 r90 top (schematic designator D7)
D7_BYPASS_2 "SK34A-LTP" SK34A-LTP-Footprint-1 -319,-383 r90 top (schematic designator D7)
D7_BYPASS_3 "SK34A-LTP" SK34A-LTP-Footprint-1 -319,-370 r90 top (schematic designator D7)
D8 "MM5Z3V3T1G" ONSC-SOD-523-2-502-01_V 130.5,20.5 r90 top
F1 "0ZCH0075AF2E" 0ZCH0075AF2E-Footprint-1 24.87,37.646 r180 top
F2_MOSFET_BANK_0 "0466003.NR" FP-0466-MFG 7.5,87.5 r90 top value=0.019Ω (schematic designator F2)
F2_MOSFET_BANK_1 "0466003.NR" FP-0466-MFG 33.5,87.5 r90 top value=0.019Ω (schematic designator F2)
F2_MOSFET_BANK_2 "0466003.NR" FP-0466-MFG 59.5,87.5 r90 top value=0.019Ω (schematic designator F2)
F2_MOSFET_BANK_3 "0466003.NR" FP-0466-MFG 85.5,87.5 r90 top value=0.019Ω (schematic designator F2)
F3_MOSFET_BANK_0 "0466003.NR" FP-0466-MFG 13.5,87.5 r90 top value=0.019Ω (schematic designator F3)
F3_MOSFET_BANK_1 "0466003.NR" FP-0466-MFG 39.5,87.5 r90 top value=0.019Ω (schematic designator F3)
F3_MOSFET_BANK_2 "0466003.NR" FP-0466-MFG 65.5,87.5 r90 top value=0.019Ω (schematic designator F3)
F3_MOSFET_BANK_3 "0466003.NR" FP-0466-MFG 91.5,87.5 r90 top value=0.019Ω (schematic designator F3)
F4_MOSFET_BANK_0 "0466003.NR" FP-0466-MFG 19.5,87.5 r90 top value=0.019Ω (schematic designator F4)
F4_MOSFET_BANK_1 "0466003.NR" FP-0466-MFG 45.5,87.5 r90 top value=0.019Ω (schematic designator F4)
F4_MOSFET_BANK_2 "0466003.NR" FP-0466-MFG 71.5,87.5 r90 top value=0.019Ω (schematic designator F4)
F4_MOSFET_BANK_3 "0466003.NR" FP-0466-MFG 97.5,87.5 r90 top value=0.019Ω (schematic designator F4)
F5_MOSFET_BANK_0 "0466003.NR" FP-0466-MFG 25.5,87.5 r90 top value=0.019Ω (schematic designator F5)
F5_MOSFET_BANK_1 "0466003.NR" FP-0466-MFG 51.5,87.5 r90 top value=0.019Ω (schematic designator F5)
F5_MOSFET_BANK_2 "0466003.NR" FP-0466-MFG 77.5,87.5 r90 top value=0.019Ω (schematic designator F5)
F5_MOSFET_BANK_3 "0466003.NR" FP-0466-MFG 103.5,87.5 r90 top value=0.019Ω (schematic designator F5)
F6_BYPASS_0 "0466003.NR" FP-0466-MFG -277,-417 r270 top value=0.019Ω (schematic designator F6)
F6_BYPASS_1 "0466003.NR" FP-0466-MFG -278,-401 r270 top value=0.019Ω (schematic designator F6)
F6_BYPASS_2 "0466003.NR" FP-0466-MFG -277,-385 r270 top value=0.019Ω (schematic designator F6)
F6_BYPASS_3 "0466003.NR" FP-0466-MFG -277,-368 r270 top value=0.019Ω (schematic designator F6)
FB1 "BLM15PX601SN1D" FP-BLM15-0_05-IPC_A 91.75,-107.5 r270 bottom
J1 "776163-1" FP-776163-1-MFG 46,113 r180 top
J2 "776163-1" FP-776163-1-MFG 124,113 r180 top
J4 "3220-10-0300-00" 3220-10-0300-00-Footprint-1 34,-111 r0 top
L1 "SRF4532-510Y" FP-SRF4532-MFG 31.25,-155 r0 top
L2_12V_REG_0 "SRP1265A-100M" FP-SRP1265A-100M-MFG 112.5,22 r90 top (schematic designator L2)
L2_12V_REG_1 "SRP1265A-100M" FP-SRP1265A-100M-MFG 152,72 r90 top (schematic designator L2)
L2_12V_REG_2 "SRP1265A-100M" FP-SRP1265A-100M-MFG 120,72 r90 top (schematic designator L2)
L3 "744311100" WE-HCI_7040 137.5,33 r90 top
Q1 "SISH615ADN-T1-GE3" SISH615ADN-T1-GE3-Footprint-1 62.463,49.49 r0 top
Q2 "SISH615ADN-T1-GE3" SISH615ADN-T1-GE3-Footprint-1 62.538,45.01 r180 top
Q3 "SISH615ADN-T1-GE3" SISH615ADN-T1-GE3-Footprint-1 58.462,49.49 r0 top
Q4 "SISH615ADN-T1-GE3" SISH615ADN-T1-GE3-Footprint-1 58.538,45.01 r180 top
Q5 "BSS138W-7-F" DIOD-SOT323-3_V 80,-145.5 r0 top
Q7_BYPASS_0 "SISH615ADN-T1-GE3" SISH615ADN-T1-GE3-Footprint-1 -337,-409 r90 top (schematic designator Q7)
Q7_BYPASS_1 "SISH615ADN-T1-GE3" SISH615ADN-T1-GE3-Footprint-1 -341,-396 r90 top (schematic designator Q7)
Q7_BYPASS_2 "SISH615ADN-T1-GE3" SISH615ADN-T1-GE3-Footprint-1 -337,-383 r90 top (schematic designator Q7)
Q7_BYPASS_3 "SISH615ADN-T1-GE3" SISH615ADN-T1-GE3-Footprint-1 -337,-370 r90 top (schematic designator Q7)
Q8_BYPASS_0 "SSM6L56FE,LM" FP-SON6-P-0_50-MFG -472,-408 r90 top (schematic designator Q8)
Q8_BYPASS_1 "SSM6L56FE,LM" FP-SON6-P-0_50-MFG -472,-396 r90 top (schematic designator Q8)
Q8_BYPASS_2 "SSM6L56FE,LM" FP-SON6-P-0_50-MFG -472,-383 r90 top (schematic designator Q8)
Q8_BYPASS_3 "SSM6L56FE,LM" FP-SON6-P-0_50-MFG -472,-370 r90 top (schematic designator Q8)
Q9 "SUD80460E-GE3" FP-T16-0236-MFG 147.744,33 r90 top
Q10 "SUD80460E-GE3" FP-T16-0236-MFG 147.744,25.5 r90 top
R1_MOSFET_BANK_0 "1k" R0603B 3,57.5 r90 top (schematic designator R1)
R1_MOSFET_BANK_1 "1k" R0603B 29,57.5 r90 top (schematic designator R1)
R1_MOSFET_BANK_2 "1k" R0603B 55,57.5 r90 top (schematic designator R1)
R1_MOSFET_BANK_3 "1k" R0603B 81,57.5 r90 top (schematic designator R1)
R2_MOSFET_BANK_0 "1k" R0603B 7.5,57.5 r90 top (schematic designator R2)
R2_MOSFET_BANK_1 "1k" R0603B 33.5,57.5 r90 top (schematic designator R2)
R2_MOSFET_BANK_2 "1k" R0603B 59.5,57.5 r90 top (schematic designator R2)
R2_MOSFET_BANK_3 "1k" R0603B 85.5,57.5 r90 top (schematic designator R2)
R3_MOSFET_BANK_0 "1k" R0603B 9,57.5 r90 top (schematic designator R3)
R3_MOSFET_BANK_1 "1k" R0603B 35,57.5 r90 top (schematic designator R3)
R3_MOSFET_BANK_2 "1k" R0603B 61,57.5 r90 top (schematic designator R3)
R3_MOSFET_BANK_3 "1k" R0603B 87,57.5 r90 top (schematic designator R3)
R4_MOSFET_BANK_0 "1k" R0603B 13.5,57.5 r90 top (schematic designator R4)
R4_MOSFET_BANK_1 "1k" R0603B 39.5,57.5 r90 top (schematic designator R4)
R4_MOSFET_BANK_2 "1k" R0603B 65.5,57.5 r90 top (schematic designator R4)
R4_MOSFET_BANK_3 "1k" R0603B 91.5,57.5 r90 top (schematic designator R4)
R5_MOSFET_BANK_0 "1k" R0603B 12,57.5 r90 top (schematic designator R5)
R5_MOSFET_BANK_1 "1k" R0603B 38,57.5 r90 top (schematic designator R5)
R5_MOSFET_BANK_2 "1k" R0603B 64,57.5 r90 top (schematic designator R5)
R5_MOSFET_BANK_3 "1k" R0603B 90,57.5 r90 top (schematic designator R5)
R6_MOSFET_BANK_0 "1k" R0603B 6,57.5 r90 top (schematic designator R6)
R6_MOSFET_BANK_1 "1k" R0603B 32,57.5 r90 top (schematic designator R6)
R6_MOSFET_BANK_2 "1k" R0603B 58,57.5 r90 top (schematic designator R6)
R6_MOSFET_BANK_3 "1k" R0603B 84,57.5 r90 top (schematic designator R6)
R7_MOSFET_BANK_0 "100k" R0603B 10.5,57.5 r270 top (schematic designator R7)
R7_MOSFET_BANK_1 "100k" R0603B 36.5,57.5 r270 top (schematic designator R7)
R7_MOSFET_BANK_2 "100k" R0603B 62.5,57.5 r270 top (schematic designator R7)
R7_MOSFET_BANK_3 "100k" R0603B 88.5,57.5 r270 top (schematic designator R7)
R8_MOSFET_BANK_0 "100k" R0603B 4.5,57.5 r270 top (schematic designator R8)
R8_MOSFET_BANK_1 "100k" R0603B 30.5,57.5 r270 top (schematic designator R8)
R8_MOSFET_BANK_2 "100k" R0603B 56.5,57.5 r270 top (schematic designator R8)
R8_MOSFET_BANK_3 "100k" R0603B 82.5,57.5 r270 top (schematic designator R8)
R9_MOSFET_BANK_0 "100k" R0603B 18,57.5 r270 top (schematic designator R9)
R9_MOSFET_BANK_1 "100k" R0603B 44,57.5 r270 top (schematic designator R9)
R9_MOSFET_BANK_2 "100k" R0603B 70,57.5 r270 top (schematic designator R9)
R9_MOSFET_BANK_3 "100k" R0603B 96,57.5 r270 top (schematic designator R9)
R10_MOSFET_BANK_0 "1k" R0603B 16.5,57.5 r90 top (schematic designator R10)
R10_MOSFET_BANK_1 "1k" R0603B 42.5,57.5 r90 top (schematic designator R10)
R10_MOSFET_BANK_2 "1k" R0603B 68.5,57.5 r90 top (schematic designator R10)
R10_MOSFET_BANK_3 "1k" R0603B 94.5,57.5 r90 top (schematic designator R10)
R11_MOSFET_BANK_0 "ERT-J1VR103J" RESC1608X90X30ML15T20 16.5,61 r90 top (schematic designator R11)
R11_MOSFET_BANK_1 "ERT-J1VR103J" RESC1608X90X30ML15T20 42.5,61 r90 top (schematic designator R11)
R11_MOSFET_BANK_2 "ERT-J1VR103J" RESC1608X90X30ML15T20 68.5,61 r90 top (schematic designator R11)
R11_MOSFET_BANK_3 "ERT-J1VR103J" RESC1608X90X30ML15T20 94.5,61 r90 top (schematic designator R11)
R12_MOSFET_BANK_0 "1k" R0603B 15,57.5 r90 top (schematic designator R12)
R12_MOSFET_BANK_1 "1k" R0603B 41,57.5 r90 top (schematic designator R12)
R12_MOSFET_BANK_2 "1k" R0603B 67,57.5 r90 top (schematic designator R12)
R12_MOSFET_BANK_3 "1k" R0603B 93,57.5 r90 top (schematic designator R12)
R13_MOSFET_BANK_0 "1k" R0603B 24,69.5 r90 top (schematic designator R13)
R13_MOSFET_BANK_1 "1k" R0603B 50,69.5 r90 top (schematic designator R13)
R13_MOSFET_BANK_2 "1k" R0603B 76,69.5 r90 top (schematic designator R13)
R13_MOSFET_BANK_3 "1k" R0603B 102,69.5 r90 top (schematic designator R13)
R14_MOSFET_BANK_0 "1k" R0603B 22.5,69.5 r90 top (schematic designator R14)
R14_MOSFET_BANK_1 "1k" R0603B 48.5,69.5 r90 top (schematic designator R14)
R14_MOSFET_BANK_2 "1k" R0603B 74.5,69.5 r90 top (schematic designator R14)
R14_MOSFET_BANK_3 "1k" R0603B 100.5,69.5 r90 top (schematic designator R14)
R15_MOSFET_BANK_0 "1k" R0603B 21,69.5 r90 top (schematic designator R15)
R15_MOSFET_BANK_1 "1k" R0603B 47,69.5 r90 top (schematic designator R15)
R15_MOSFET_BANK_2 "1k" R0603B 73,69.5 r90 top (schematic designator R15)
R15_MOSFET_BANK_3 "1k" R0603B 99,69.5 r90 top (schematic designator R15)
R16_MOSFET_BANK_0 "56" R0603B 25,64 r0 top (schematic designator R16)
R16_MOSFET_BANK_1 "56" R0603B 51,64 r0 top (schematic designator R16)
R16_MOSFET_BANK_2 "56" R0603B 77,64 r0 top (schematic designator R16)
R16_MOSFET_BANK_3 "56" R0603B 103,64 r0 top (schematic designator R16)
R17_MOSFET_BANK_0 "1k" R0603B 19.5,69.5 r90 top (schematic designator R17)
R17_MOSFET_BANK_1 "1k" R0603B 45.5,69.5 r90 top (schematic designator R17)
R17_MOSFET_BANK_2 "1k" R0603B 71.5,69.5 r90 top (schematic designator R17)
R17_MOSFET_BANK_3 "1k" R0603B 97.5,69.5 r90 top (schematic designator R17)
R18_MOSFET_BANK_0 "100k" R0603B 6.5,82.5 r0 top value=10k (schematic designator R18)
R18_MOSFET_BANK_1 "100k" R0603B 32.5,82.5 r0 top value=10k (schematic designator R18)
R18_MOSFET_BANK_2 "100k" R0603B 58.5,82.5 r0 top value=10k (schematic designator R18)
R18_MOSFET_BANK_3 "100k" R0603B 84.5,82.5 r0 top value=10k (schematic designator R18)
R19_MOSFET_BANK_0 "100k" R0603B 12.5,82.5 r0 top value=10k (schematic designator R19)
R19_MOSFET_BANK_1 "100k" R0603B 38.5,82.5 r0 top value=10k (schematic designator R19)
R19_MOSFET_BANK_2 "100k" R0603B 64.5,82.5 r0 top value=10k (schematic designator R19)
R19_MOSFET_BANK_3 "100k" R0603B 90.5,82.5 r0 top value=10k (schematic designator R19)
R20_MOSFET_BANK_0 "100k" R0603B 18.5,82.5 r0 top value=10k (schematic designator R20)
R20_MOSFET_BANK_1 "100k" R0603B 44.5,82.5 r0 top value=10k (schematic designator R20)
R20_MOSFET_BANK_2 "100k" R0603B 70.5,82.5 r0 top value=10k (schematic designator R20)
R20_MOSFET_BANK_3 "100k" R0603B 96.5,82.5 r0 top value=10k (schematic designator R20)
R21_MOSFET_BANK_0 "100k" R0603B 24.5,82.5 r0 top value=10k (schematic designator R21)
R21_MOSFET_BANK_1 "100k" R0603B 50.5,82.5 r0 top value=10k (schematic designator R21)
R21_MOSFET_BANK_2 "100k" R0603B 76.5,82.5 r0 top value=10k (schematic designator R21)
R21_MOSFET_BANK_3 "100k" R0603B 102.5,82.5 r0 top value=10k (schematic designator R21)
R22_MOSFET_BANK_0 "24k" R0603B 5.25,84 r180 top value=2.7k (schematic designator R22)
R22_MOSFET_BANK_1 "24k" R0603B 31.25,84 r180 top value=2.7k (schematic designator R22)
R22_MOSFET_BANK_2 "24k" R0603B 57.25,84 r180 top value=2.7k (schematic designator R22)
R22_MOSFET_BANK_3 "24k" R0603B 83.25,84 r180 top value=2.7k (schematic designator R22)
R23_MOSFET_BANK_0 "24k" R0603B 11.25,84 r180 top value=2.7k (schematic designator R23)
R23_MOSFET_BANK_1 "24k" R0603B 37.25,84 r180 top value=2.7k (schematic designator R23)
R23_MOSFET_BANK_2 "24k" R0603B 63.25,84 r180 top value=2.7k (schematic designator R23)
R23_MOSFET_BANK_3 "24k" R0603B 89.25,84 r180 top value=2.7k (schematic designator R23)
R24_MOSFET_BANK_0 "24k" R0603B 17.25,84 r180 top value=2.7k (schematic designator R24)
R24_MOSFET_BANK_1 "24k" R0603B 43.25,84 r180 top value=2.7k (schematic designator R24)
R24_MOSFET_BANK_2 "24k" R0603B 69.25,84 r180 top value=2.7k (schematic designator R24)
R24_MOSFET_BANK_3 "24k" R0603B 95.25,84 r180 top value=2.7k (schematic designator R24)
R25_MOSFET_BANK_0 "24k" R0603B 23.25,84 r180 top value=2.7k (schematic designator R25)
R25_MOSFET_BANK_1 "24k" R0603B 49.25,84 r180 top value=2.7k (schematic designator R25)
R25_MOSFET_BANK_2 "24k" R0603B 75.25,84 r180 top value=2.7k (schematic designator R25)
R25_MOSFET_BANK_3 "24k" R0603B 101.25,84 r180 top value=2.7k (schematic designator R25)
R26 "100k" R0603B 29.12,50.396 r180 top
R27 "100k" R0603B 18.62,50.396 r0 top
R28 "100k" R0603B 82.5,-145.5 r90 top
R29 "100k" R0603B 96.5,-142.25 r90 top
R30 "1k" R0603B 76,-145.5 r90 top
R31 "24k" R0603B 96.5,-144.75 r90 top
R32 "100k" R0603B 77.5,-145.5 r90 top
R33 "100k" R0603B 177,-169 r90 top
R34 "1k" R0603B 175.5,-169 r90 top
R35 "60.4" R0603B 25.25,-153.9 r90 top
R36 "100k" R0603B 216.998,6.499 r180 top value=10k
R37 "60.4" R0603B 25.25,-156.25 r90 top
R38 "10k" R0603B 39,-109 r90 top
R39 "330" R0603B -26.664,-9.85 r90 top
R40 "330" R0603B -18.164,-2.5 r90 top
R41 "100k" R0603B -28.664,-10 r90 top value=10k
R42 "100k" R0603B -21.164,-2.15 r90 top value=10k
R43 "330" R0603B -240,-3.5 r90 top
R44 "330" R0603B -240.5,-8.15 r90 top
R45 "330" R0603B -241,-14 r90 top
R46 "330" R0603B -242,-19.65 r90 top
R47_12V_REG_0 "100k" R0603B 103.5,31.5 r270 top value=10k (schematic designator R47)
R47_12V_REG_1 "100k" R0603B 143,81.5 r270 top value=10k (schematic designator R47)
R47_12V_REG_2 "100k" R0603B 111,81.5 r270 top value=10k (schematic designator R47)
R48_12V_REG_0 "1k" R0603B 112.5,8 r0 bottom (schematic designator R48)
R48_12V_REG_1 "1k" R0603B 152,58 r0 bottom (schematic designator R48)
R48_12V_REG_2 "1k" R0603B 120,58 r0 bottom (schematic designator R48)
R49_12V_REG_0 "24k" R0603B 103.5,28.5 r270 top value=2.7k (schematic designator R49)
R49_12V_REG_1 "24k" R0603B 143,78.5 r270 top value=2.7k (schematic designator R49)
R49_12V_REG_2 "24k" R0603B 111,78.5 r270 top value=2.7k (schematic designator R49)
R50_12V_REG_0 "DNP" R0603B 102,31.5 r90 top value=10k (schematic designator R50)
R50_12V_REG_1 "DNP" R0603B 141.5,81.5 r90 top value=10k (schematic designator R50)
R50_12V_REG_2 "DNP" R0603B 109.5,81.5 r90 top value=10k (schematic designator R50)
R51_12V_REG_0 "1k" R0603B 118.5,4 r90 bottom (schematic designator R51)
R51_12V_REG_1 "1k" R0603B 158,54 r90 bottom (schematic designator R51)
R51_12V_REG_2 "1k" R0603B 126,54 r90 bottom (schematic designator R51)
R52_12V_REG_0 "1k" R0603B 100.5,31.5 r90 top (schematic designator R52)
R52_12V_REG_1 "1k" R0603B 140,81.5 r90 top (schematic designator R52)
R52_12V_REG_2 "1k" R0603B 108,81.5 r90 top (schematic designator R52)
R53 "100k" R0603B 212.998,6.499 r180 top value=10k
R54_BYPASS_0 "100k" R0603B -376,-406 r90 top (schematic designator R54)
R54_BYPASS_1 "100k" R0603B -379,-394 r90 top (schematic designator R54)
R54_BYPASS_2 "100k" R0603B -376,-381 r90 top (schematic designator R54)
R54_BYPASS_3 "100k" R0603B -376,-368 r90 top (schematic designator R54)
R55_BYPASS_0 "1k" R0603B -395,-406 r90 top (schematic designator R55)
R55_BYPASS_1 "1k" R0603B -398,-394 r90 top (schematic designator R55)
R55_BYPASS_2 "1k" R0603B -395,-381 r90 top (schematic designator R55)
R55_BYPASS_3 "1k" R0603B -395,-368 r90 top (schematic designator R55)
R56_BYPASS_0 "1k" R0603B -415,-406 r90 top (schematic designator R56)
R56_BYPASS_1 "1k" R0603B -417,-394 r90 top (schematic designator R56)
R56_BYPASS_2 "1k" R0603B -415,-381 r90 top (schematic designator R56)
R56_BYPASS_3 "1k" R0603B -415,-368 r90 top (schematic designator R56)
R57_BYPASS_0 "100k" R0603B -297,-417 r270 top (schematic designator R57)
R57_BYPASS_1 "100k" R0603B -297,-400 r270 top (schematic designator R57)
R57_BYPASS_2 "100k" R0603B -297,-384 r270 top (schematic designator R57)
R57_BYPASS_3 "100k" R0603B -297,-368 r270 top (schematic designator R57)
R58_BYPASS_0 "1k" R0603B -454,-406 r90 top (schematic designator R58)
R58_BYPASS_1 "1k" R0603B -455,-394 r90 top (schematic designator R58)
R58_BYPASS_2 "1k" R0603B -454,-381 r90 top (schematic designator R58)
R58_BYPASS_3 "1k" R0603B -454,-368 r90 top (schematic designator R58)
R59_BYPASS_0 "100k" R0603B -492,-406 r90 top (schematic designator R59)
R59_BYPASS_1 "100k" R0603B -492,-394 r90 top (schematic designator R59)
R59_BYPASS_2 "100k" R0603B -492,-381 r90 top (schematic designator R59)
R59_BYPASS_3 "100k" R0603B -492,-368 r90 top (schematic designator R59)
R60 "56" R0603B -515.462,28.75 r90 top
R61 "100k" R0603B -578.708,28.75 r90 top
R62 "100k" R0603B -572.866,28.75 r90 top
R63 "100k" R0603B -566.516,29.258 r0 top
R64 "100k" R0603B -561.69,28.75 r90 top
R65 "100k" R0603B -555.848,28.75 r90 top
R66 "100k" R0603B -550.006,28.75 r90 top
R67 "100k" R0603B -544.164,28.75 r90 top
R68 "100k" R0603B -538.322,28.75 r90 top
R69 "100k" R0603B -624.936,28.75 r90 top
R70 "100k" R0603B -619.094,28.75 r90 top
R71 "100k" R0603B -613.252,28.75 r90 top
R72 "100k" R0603B -607.41,28.75 r90 top
R73 "100k" R0603B -601.06,29.258 r0 top
R74 "100k" R0603B -596.234,28.75 r90 top
R75 "100k" R0603B -590.392,28.75 r90 top
R76 "100k" R0603B -584.55,28.75 r90 top
R77 "24k" R0603B -671.164,28.75 r90 top
R78 "24k" R0603B -665.322,28.75 r90 top
R79 "24k" R0603B -659.48,28.75 r90 top
R80 "24k" R0603B -653.638,28.75 r90 top
R81 "24k" R0603B -647.796,28.75 r90 top
R82 "24k" R0603B -641.954,28.75 r90 top
R83 "24k" R0603B -635.604,29.258 r0 top
R84 "24k" R0603B -630.778,28.75 r90 top
R85 "FCSL90R001JER" FP-FCSL90-R001-MFG 129.5,47 r0 top
R86 "1k" R0603B 137.5,30.25 r90 bottom value=330
R87 "100k" R0603B 167,10 r270 top value=330
R88 "28.7k" R0603B 133.5,23 r90 bottom value=330
R89 "100k" R0603B 138.25,21.25 r0 top value=330
R90 "14k" R0603B 133.5,25.75 r270 bottom value=330
R91 "50k" R0603B 135.75,30.25 r90 bottom value=330
R92 "21k" R0603B 135,25.75 r90 bottom value=330
R93 "100k" R0603B 132,18 r90 top value=330
R94 "10k" R0603B 132,20.5 r90 top value=330
SW1 "KXT331LHS" FP-KXT331LHS-MFG 181.75,-170 r0 top
SW2 "KXT331LHS" FP-KXT331LHS-MFG -9,-4 r90 top
SW3 "KXT331LHS" FP-KXT331LHS-MFG -14,-4 r90 top
U1_MOSFET_BANK_0 "ACS711KLCTR-12AB-T" FP-LC-8-IPC_C 4.5,77.5 r90 top (schematic designator U1)
U1_MOSFET_BANK_1 "ACS711KLCTR-12AB-T" FP-LC-8-IPC_C 30.5,77.5 r90 top (schematic designator U1)
U1_MOSFET_BANK_2 "ACS711KLCTR-12AB-T" FP-LC-8-IPC_C 56.5,77.5 r90 top (schematic designator U1)
U1_MOSFET_BANK_3 "ACS711KLCTR-12AB-T" FP-LC-8-IPC_C 82.5,77.5 r90 top (schematic designator U1)
U2_MOSFET_BANK_0 "ITS716G" INF-PG-DSO-20-32_L 8.5,65.5 r90 top (schematic designator U2)
U2_MOSFET_BANK_1 "ITS716G" INF-PG-DSO-20-32_L 34.5,65.5 r90 top (schematic designator U2)
U2_MOSFET_BANK_2 "ITS716G" INF-PG-DSO-20-32_L 60.5,65.5 r90 top (schematic designator U2)
U2_MOSFET_BANK_3 "ITS716G" INF-PG-DSO-20-32_L 86.5,65.5 r90 top (schematic designator U2)
U3_MOSFET_BANK_0 "ACS711KLCTR-12AB-T" FP-LC-8-IPC_C 10.5,77.5 r90 top (schematic designator U3)
U3_MOSFET_BANK_1 "ACS711KLCTR-12AB-T" FP-LC-8-IPC_C 36.5,77.5 r90 top (schematic designator U3)
U3_MOSFET_BANK_2 "ACS711KLCTR-12AB-T" FP-LC-8-IPC_C 62.5,77.5 r90 top (schematic designator U3)
U3_MOSFET_BANK_3 "ACS711KLCTR-12AB-T" FP-LC-8-IPC_C 88.5,77.5 r90 top (schematic designator U3)
U4_MOSFET_BANK_0 "ACS711KLCTR-12AB-T" FP-LC-8-IPC_C 16.5,77.5 r90 top (schematic designator U4)
U4_MOSFET_BANK_1 "ACS711KLCTR-12AB-T" FP-LC-8-IPC_C 42.5,77.5 r90 top (schematic designator U4)
U4_MOSFET_BANK_2 "ACS711KLCTR-12AB-T" FP-LC-8-IPC_C 68.5,77.5 r90 top (schematic designator U4)
U4_MOSFET_BANK_3 "ACS711KLCTR-12AB-T" FP-LC-8-IPC_C 94.5,77.5 r90 top (schematic designator U4)
U5_MOSFET_BANK_0 "ACS711KLCTR-12AB-T" FP-LC-8-IPC_C 22.5,77.5 r90 top (schematic designator U5)
U5_MOSFET_BANK_1 "ACS711KLCTR-12AB-T" FP-LC-8-IPC_C 48.5,77.5 r90 top (schematic designator U5)
U5_MOSFET_BANK_2 "ACS711KLCTR-12AB-T" FP-LC-8-IPC_C 74.5,77.5 r90 top (schematic designator U5)
U5_MOSFET_BANK_3 "ACS711KLCTR-12AB-T" FP-LC-8-IPC_C 100.5,77.5 r90 top (schematic designator U5)
U6_MOSFET_BANK_0 "ADC088S022CIMT/NOPB" MTC16_L 20.5,63.5 r270 top (schematic designator U6)
U6_MOSFET_BANK_1 "ADC088S022CIMT/NOPB" MTC16_L 46.5,63.5 r270 top (schematic designator U6)
U6_MOSFET_BANK_2 "ADC088S022CIMT/NOPB" MTC16_L 72.5,63.5 r270 top (schematic designator U6)
U6_MOSFET_BANK_3 "ADC088S022CIMT/NOPB" MTC16_L 98.5,63.5 r270 top (schematic designator U6)
U7 "ACS711KLCTR-25AB-T" FP-LC-8-IPC_A 60.5,39 r180 top
U8 "TCAN1146DYYRQ1" TCAN1146DYYRQ1-Footprint-1 158.388,-146.371 r0 top
U9 "AP7381-50Y-13" FP-SOT89-MFG 21.37,31.646 r180 top
U10 "STM32H730VBT6" FP-LQFP100-1L-IPC_C 94.5,-107 r0 top
U11_12V_REG_0 "LM2677S-12/NOPB" KTW0007B_M 118.5,8 r0 top (schematic designator U11)
U11_12V_REG_1 "LM2677S-12/NOPB" KTW0007B_M 158,58 r0 top (schematic designator U11)
U11_12V_REG_2 "LM2677S-12/NOPB" KTW0007B_M 126,58 r0 top (schematic designator U11)
U12_12V_REG_0 "ACS711KLCTR-12AB-T" FP-LC-8-IPC_C 101.5,36 r180 top (schematic designator U12)
U12_12V_REG_1 "ACS711KLCTR-12AB-T" FP-LC-8-IPC_C 141,86 r180 top (schematic designator U12)
U12_12V_REG_2 "ACS711KLCTR-12AB-T" FP-LC-8-IPC_C 109,86 r180 top (schematic designator U12)
U13 "ADC088S022CIMT/NOPB" MTC16_L -506.826,26.845 r0 top
U14 "LM51231QRGRRQ1" QFN50P350X350X100_HS-21N 136.5,25.5 r90 top
U15 "ACS711KLCTR-12AB-T" FP-LC-8-IPC_C 162,11 r0 top
U16 "CAT25256VI-GT3" FP-CAT25256VI-GT3-IPC_C 227.998,4.999 r180 top
XF1 "3557-2" KSTN-3557-2 76.5,49 r180 top
XF2 "3557-2" KSTN-3557-2 76.5,9 r0 top
XF3 "3557-2" KSTN-3557-2 76.5,17 r0 top
XF4 "3557-2" KSTN-3557-2 76.5,25 r0 top
XF5 "3557-2" KSTN-3557-2 76.5,33 r0 top
XF6 "3557-2" KSTN-3557-2 76.5,41 r0 top
Y1 "ABM8-48.000MHZ-B2-T" FP-ABM8-MFG 77,-117.5 r180 top
Y2 "ECS-.327-12.5-1210-TR" FP-ECX-1210-MFG 76.5,-107.5 r270 top

## Footprints (in the part's own frame and the unit in brackets; to place one, negate y for a bottom-side part, rotate by r counter-clockwise, add the part's x,y. Pads: shape width x height; smd on the part's side, far side on the other; paste and mask are expansions set on the pad)
0ZCH0075AF2E-Footprint-1 [mil]
  rect 39x110 smd paste+0 mask+0: 1(-59,0) 2(59,0)
  silkscreen extent -27,-60 27,60, body extent -67,-55 67,55, height 47
3220-10-0300-00-Footprint-1 [mm]
  rrect50% 2.2x0.65 smd: 1(-1.73,2.54) 2(1.73,2.54) 3(-1.73,1.27) 4(1.73,1.27) 5(-1.73,0) 6(1.73,0) 7(-1.73,-1.27) 8(1.73,-1.27) 9(-1.73,-2.54) 10(1.73,-2.54)
  silkscreen extent -2.5,-6.35 2.5,6.35, body extent -2.74,-6.39 2.76,6.31, height 5.22
CAPC2013X145X50ML20T25 [mm] "Chip Capacitor, 2-Leads, Body 2.00x1.25mm, IPC Low Density"
  rect 1.5x1.55 smd: 1(-0.9,0) 2(0.9,0)
  body extent -1.1,-0.72 1.1,0.72, height 1.45
CAPC3216X110X50LL20T25 [mm] "Chip Capacitor, 2-Leads, Body 3.20x1.60mm, IPC High Density"
  rect 1.1x1.7 smd: 1(-1.3,0) 2(1.3,0)
  silkscreen extent -0.35,-0.75 0.35,0.75, body extent -1.7,-0.9 1.7,0.9, height 1.1
DIOD-SOT323-3_V [mm] "SOT323, 3-Leads, Body 2.2x1.35mm, Pitch 0.65mm"
  rect 0.9x0.7 smd: 1(-0.95,0.65) 2(-0.95,-0.65) 3(0.95,0)
  silkscreen extent -1.07,-1.1 0.67,1.67, body extent -1.1,-1.1 1.1,1.1, height 1.07
FP-0402-L_1_0_0_05-W_0_5-IPC_A [mm]
  rect 0.715x0.672 smd paste+0 mask+0: 1(-0.479,0) 2(0.479,0)
  silkscreen extent -0.84,-0.74 0.84,0.74, body extent -1.04,-0.54 1.04,0.54, height 0.25
FP-0466-MFG [mil]
  rect 45x80 smd paste+0 mask+0: 1(-52.5,0) 2(52.5,0)
  silkscreen extent -15,-32 15,32, body extent -79,-44 79,44, height 10
FP-776163-1-MFG [mm]
  rect 2.65x2.65 hole 1.75 paste-2539.97 mask+0: 1(-22,16.95)
  round 2.65 hole 1.75 paste-2539.97 mask+0: 2(-18,16.95) 3(-14,16.95) 4(-10,16.95) 5(-6,16.95) 6(-2,16.95) 7(2,16.95) 8(6,16.95) 9(10,16.95) 10(14,16.95) 11(18,16.95) 12(22,16.95) 13(-20,12.95) 14(-16,12.95) 15(-12,12.95) 16(-8,12.95) 17(-4,12.95) 18(0,12.95) 19(4,12.95) 20(8,12.95) 21(12,12.95) 22(16,12.95) 23(20,12.95) 24(-22,8.95) 25(-18,8.95) 26(-14,8.95) 27(-10,8.95) 28(-6,8.95) 29(-2,8.95) 30(2,8.95) 31(6,8.95) 32(10,8.95) 33(14,8.95) 34(18,8.95) 35(22,8.95)
  round 2.85 hole 2.85 unplated paste-2539.97 mask+0: ""(-28.5,12.45) ""(28.5,12.45)
  silkscreen extent -39.18,4.1 38.55,19.15, body extent -38.65,-19.25 38.65,19.25, height 0.25
FP-ABM8-MFG [mm]
  rect 1.3x1.05 smd paste+0 mask+0: 1(-1.15,-0.875) 2(1.15,-0.875) 3(1.15,0.875) 4(-1.15,0.875)
  silkscreen extent -2.5,-1.88 1.7,1.88, body extent -1.9,-1.5 1.9,1.5, height 0.25
FP-BLM15-0_05-IPC_A [mm]
  rect 0.715x0.672 smd paste+0 mask+0: 1(-0.479,0) 2(0.479,0)
  silkscreen extent -0.84,-0.74 0.84,0.74, body extent -0.5,-0.25 0.5,0.25, height 0.55
FP-CAT25256VI-GT3-IPC_C [mm]
  rect 1.874x0.545 smd paste+0 mask+0: 1(-2.316,1.905)
  rrect100% 1.874x0.545 smd paste+0 mask+0: 2(-2.316,0.635) 3(-2.316,-0.635) 4(-2.316,-1.905) 5(2.316,-1.905) 6(2.316,-0.635) 7(2.316,0.635) 8(2.316,1.905)
  silkscreen extent -4.25,-2.45 0.88,2.45, body extent -3.35,-2.55 3.35,2.55, height 0.25
FP-CKG57N-MFG [mm]
  rect 1.75x4.75 smd paste+0 mask+0: 1(-2.925,0) 2(2.925,0)
  silkscreen extent -1.68,-2.75 1.68,2.75, body extent -3.9,-2.85 3.9,2.85, height 0.25
FP-ECX-1210-MFG [mm]
  rect 0.575x1.14 smd paste+0 mask+0: 1(-0.413,0) 2(0.413,0)
  silkscreen extent -0.65,-0.95 0.65,0.95, body extent -0.8,-0.67 0.8,0.67, height 0.25
FP-FCSL90-R001-MFG [mm]
  rect 1.9x9.2 smd paste+0 mask+0: 1(-1.6,0) 2(1.6,0)
  silkscreen extent -0.3,-4.55 0.3,4.55, body extent -2.65,-4.7 2.65,4.7, height 0.25
FP-GRM31-0_2-MFG [mm]
  rect 1.05x1.6 smd paste+0 mask+0: 1(-1.475,0) 2(1.475,0)
  silkscreen extent -0.58,-0.9 0.58,0.9, body extent -2.1,-1 2.1,1, height 0.25
FP-KXT331LHS-MFG [mm]
  rect 0.55x1.5 smd paste+0 mask+0: 1(-1.625,0) 2(1.625,0)
  silkscreen extent -1.65,-1.15 1.65,1.15, body extent -2,-1.25 2,1.25, height 0.25
FP-LC-8-IPC_A [mm]
  rect 2.474x0.622 smd paste+0 mask+0: 1(-2.416,1.905)
  rrect100% 2.474x0.622 smd paste+0 mask+0: 2(-2.416,0.635) 3(-2.416,-0.635) 4(-2.416,-1.905) 5(2.416,-1.905) 6(2.416,-0.635) 7(2.416,0.635) 8(2.416,1.905)
  silkscreen extent -4.38,-2.45 0.68,2.45, body extent -4.15,-2.95 4.15,2.95, height 0.25
FP-LC-8-IPC_C [mm]
  rect 1.874x0.542 smd paste+0 mask+0: 1(-2.316,1.905)
  rrect100% 1.874x0.542 smd paste+0 mask+0: 2(-2.316,0.635) 3(-2.316,-0.635) 4(-2.316,-1.905) 5(2.316,-1.905) 6(2.316,-0.635) 7(2.316,0.635) 8(2.316,1.905)
  silkscreen extent -3.97,-2.45 0.88,2.45, body extent -3.35,-2.55 3.35,2.55, height 0.25
FP-LQFP100-1L-IPC_C [mm]
  rect 1.355x0.212 smd paste+0 mask+0: 1(-7.575,6)
  rrect100% 1.355x0.212 smd paste+0 mask+0: 2(-7.575,5.5) 3(-7.575,5) 4(-7.575,4.5) 5(-7.575,4) 6(-7.575,3.5) 7(-7.575,3) 8(-7.575,2.5) 9(-7.575,2) 10(-7.575,1.5) 11(-7.575,1) 12(-7.575,0.5) 13(-7.575,0) 14(-7.575,-0.5) 15(-7.575,-1) 16(-7.575,-1.5) 17(-7.575,-2) 18(-7.575,-2.5) 19(-7.575,-3) 20(-7.575,-3.5) 21(-7.575,-4) 22(-7.575,-4.5) 23(-7.575,-5) 24(-7.575,-5.5) 25(-7.575,-6) 51(7.575,-6) 52(7.575,-5.5) 53(7.575,-5) 54(7.575,-4.5) 55(7.575,-4) 56(7.575,-3.5) 57(7.575,-3) 58(7.575,-2.5) 59(7.575,-2) 60(7.575,-1.5) 61(7.575,-1) 62(7.575,-0.5) 63(7.575,0) 64(7.575,0.5) 65(7.575,1) 66(7.575,1.5) 67(7.575,2) 68(7.575,2.5) 69(7.575,3) 70(7.575,3.5) 71(7.575,4) 72(7.575,4.5) 73(7.575,5) 74(7.575,5.5) 75(7.575,6)
  rrect100% 0.212x1.355 smd paste+0 mask+0: 26(-6,-7.575) 27(-5.5,-7.575) 28(-5,-7.575) 29(-4.5,-7.575) 30(-4,-7.575) 31(-3.5,-7.575) 32(-3,-7.575) 33(-2.5,-7.575) 34(-2,-7.575) 35(-1.5,-7.575) 36(-1,-7.575) 37(-0.5,-7.575) 38(0,-7.575) 39(0.5,-7.575) 40(1,-7.575) 41(1.5,-7.575) 42(2,-7.575) 43(2.5,-7.575) 44(3,-7.575) 45(3.5,-7.575) 46(4,-7.575) 47(4.5,-7.575) 48(5,-7.575) 49(5.5,-7.575) 50(6,-7.575) 76(6,7.575) 77(5.5,7.575) 78(5,7.575) 79(4.5,7.575) 80(4,7.575) 81(3.5,7.575) 82(3,7.575) 83(2.5,7.575) 84(2,7.575) 85(1.5,7.575) 86(1,7.575) 87(0.5,7.575) 88(0,7.575) 89(-0.5,7.575) 90(-1,7.575) 91(-1.5,7.575) 92(-2,7.575) 93(-2.5,7.575) 94(-3,7.575) 95(-3.5,7.575) 96(-4,7.575) 97(-4.5,7.575) 98(-5,7.575) 99(-5.5,7.575) 100(-6,7.575)
  silkscreen extent -7.7,-6.25 6.25,6.83, body extent -8.35,-8.35 8.35,8.35, height 0.25
FP-OS-CON-SMT-F12-MFG [mm]
  rect 4.4x1.9 smd paste+0 mask+0: 1(-4.35,0) 2(4.35,0)
  silkscreen extent -7.25,-5.25 5.25,5.25, body extent -6.8,-5.5 6.8,5.5, height 0.25
FP-SMC-MFG [mm]
  rect 2.5x3.3 smd paste+0 mask+0: 1(-3.45,0) 2(3.45,0)
  silkscreen extent -4.25,-3.11 3.55,3.11, body extent -4.8,-3.21 4.8,3.21, height 0.25